# EAGLE board main (EAGLE 5.11), part 1 of 3
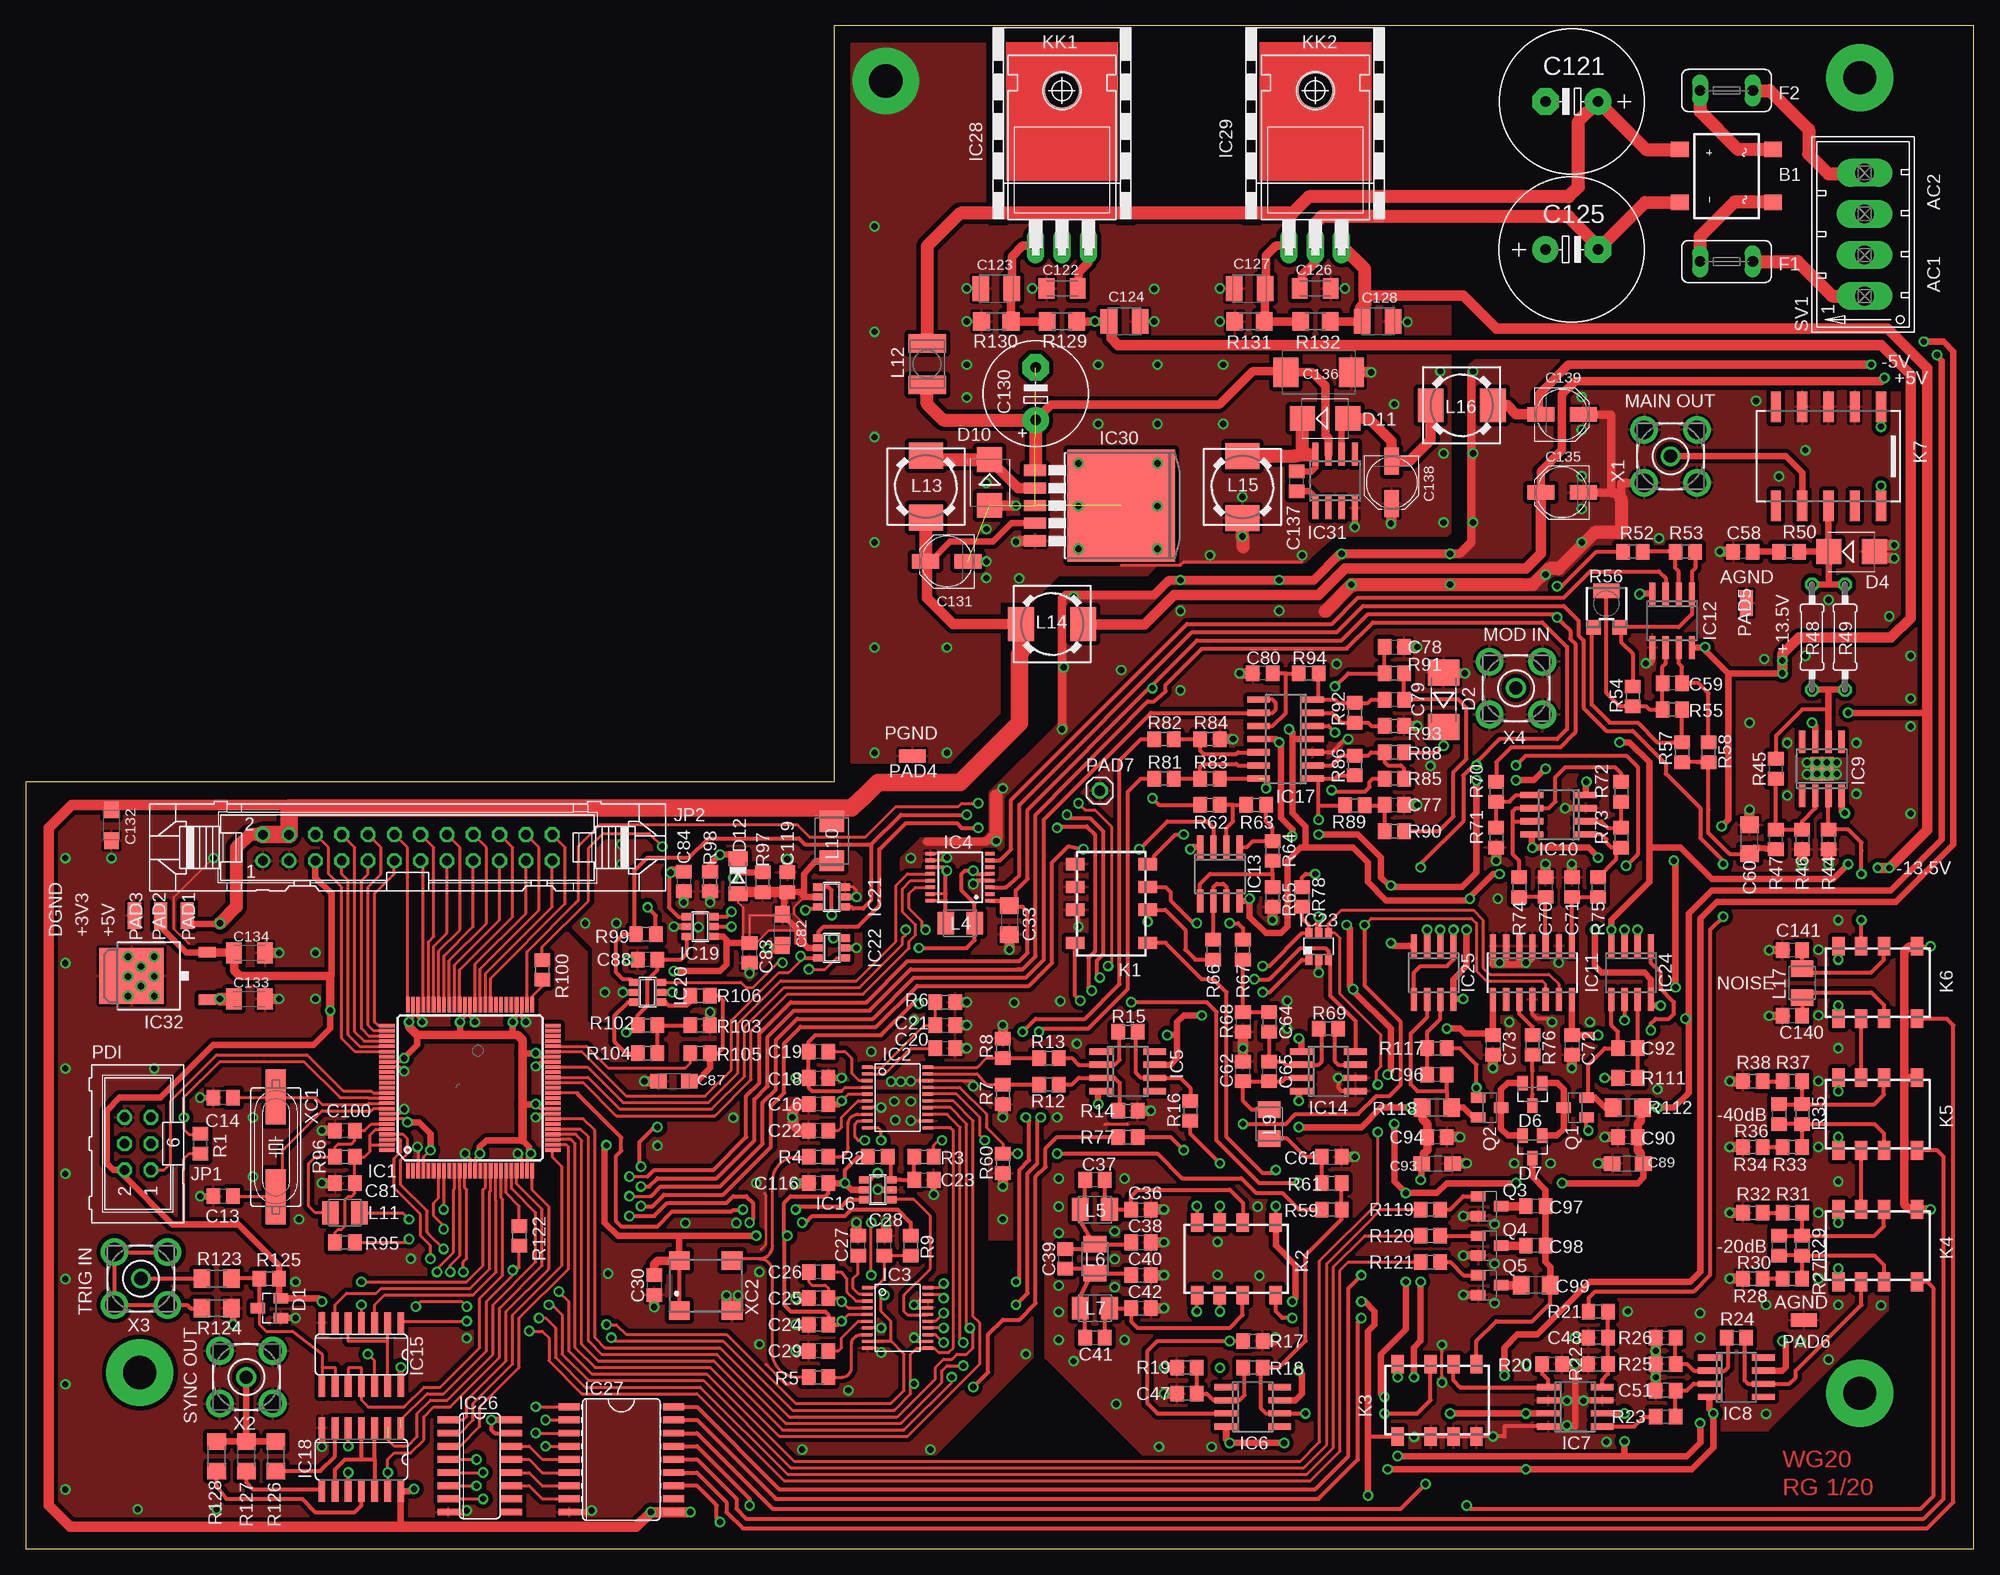
[diagram p0: board, top side]
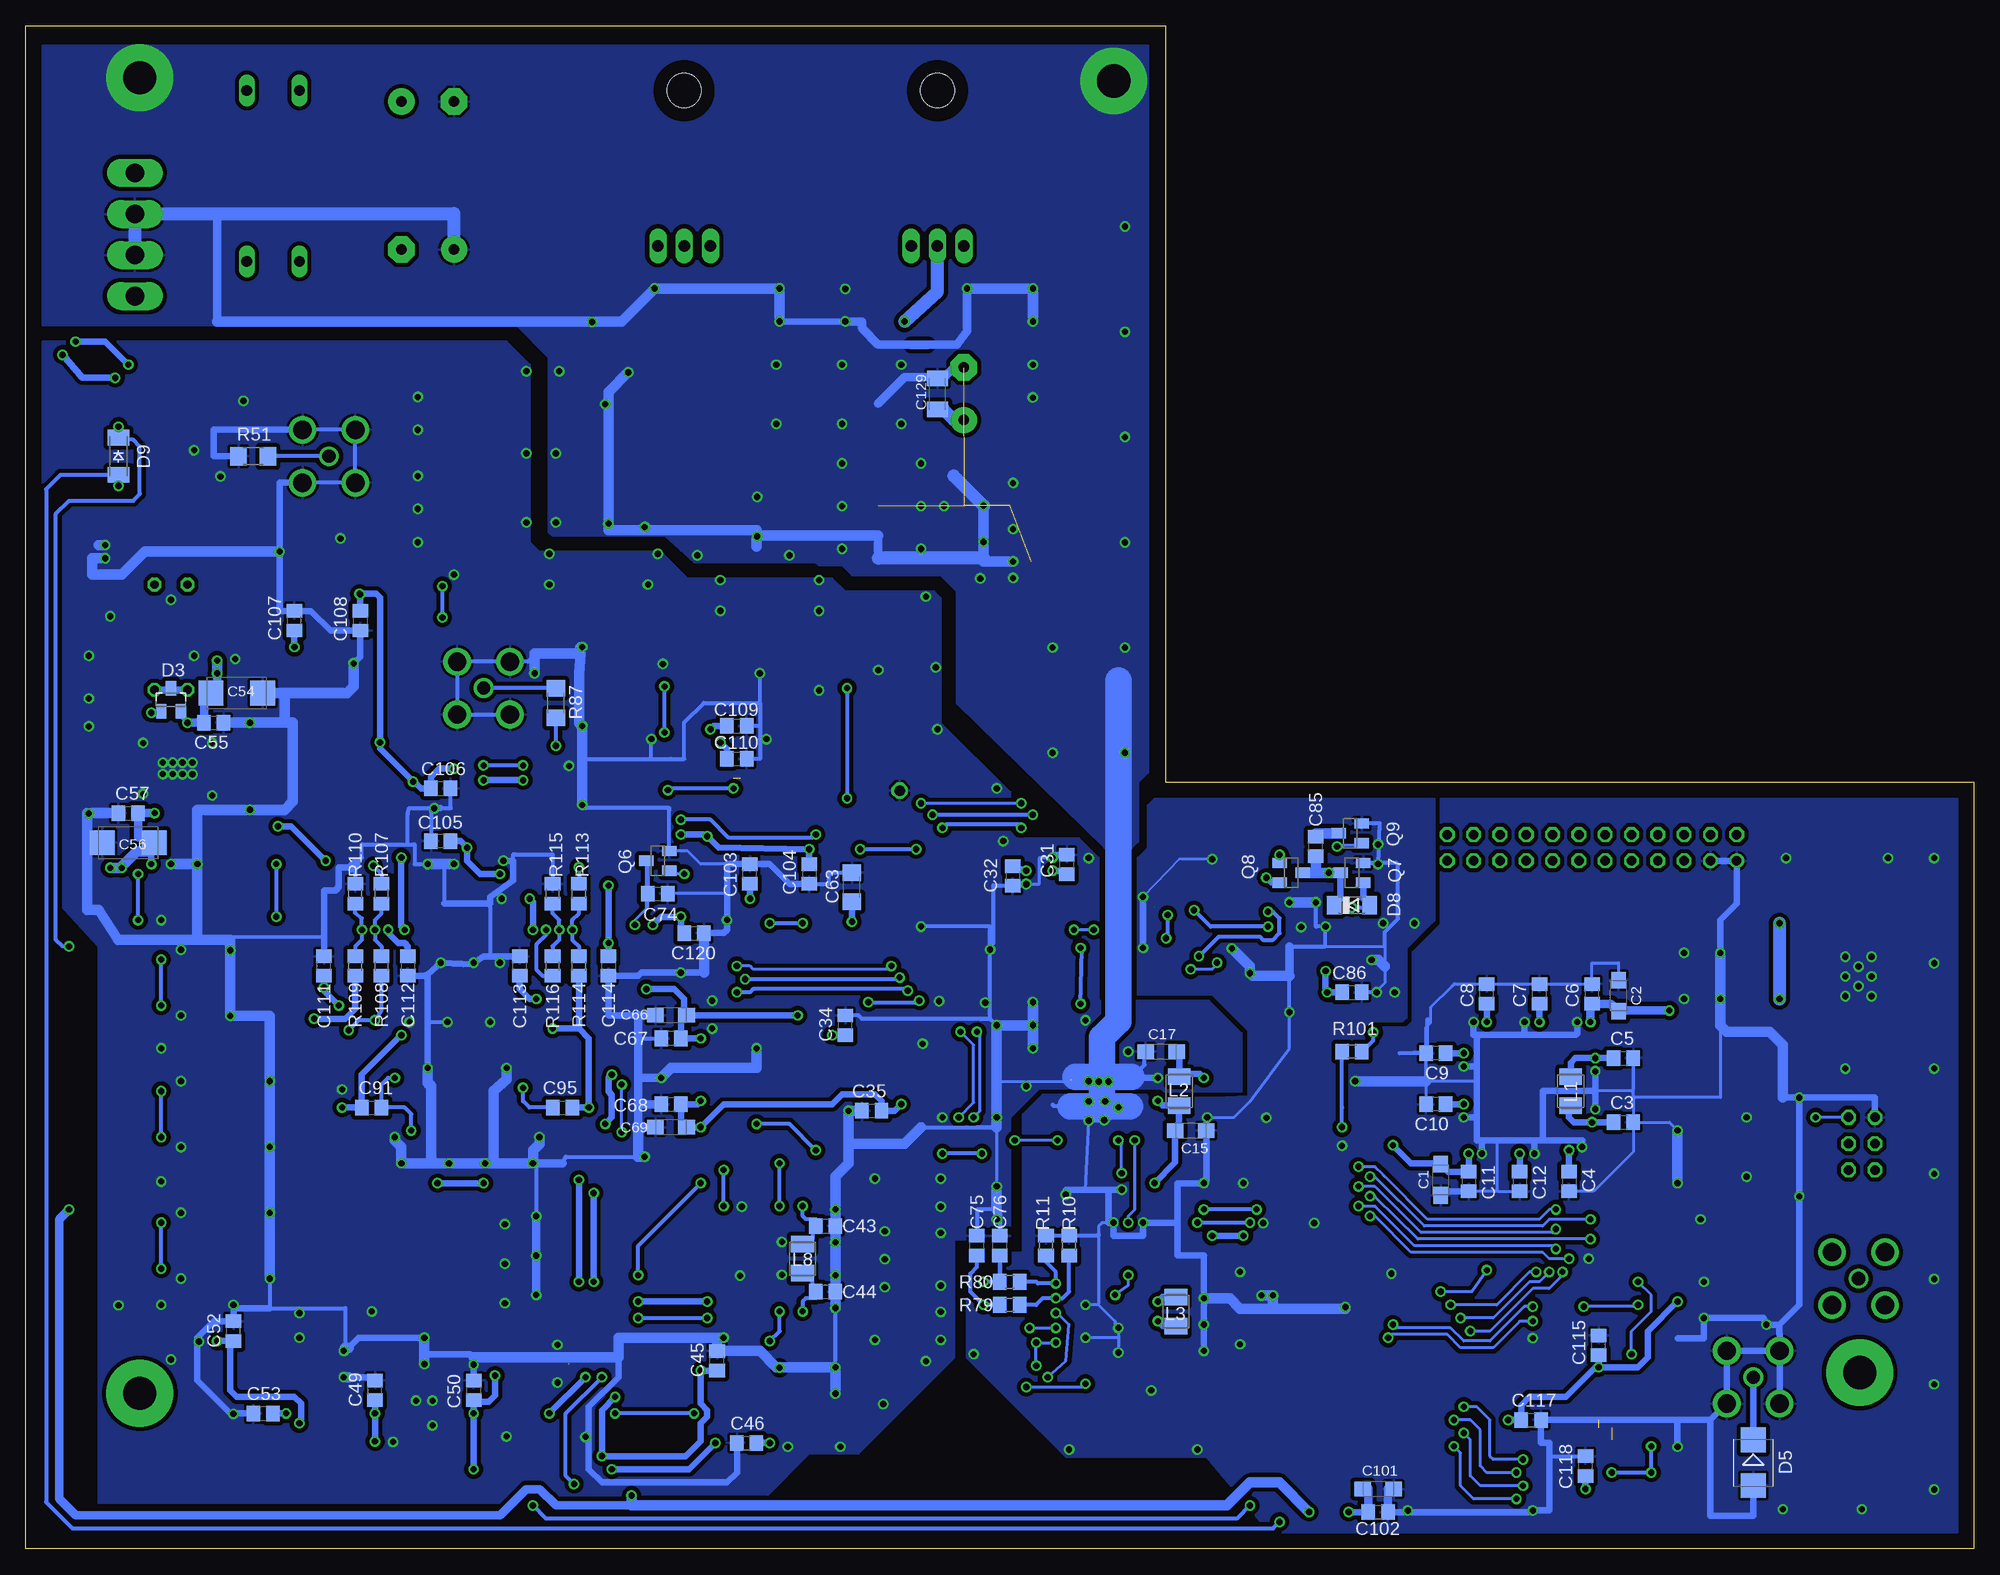
[diagram p1: board, bottom side, seen from below]

Size 188 x 147 mm. Coordinates in mm from the lower left corner, seen from the top.
Outline: 0,0 188,0 188,147 78,147 78,74 0,74 0,0
Copper layers (1*16): Top 0.035mm / dielectric 1.5mm / Bottom 0.035mm
Design rules "default": minimum track width 10mil, minimum drill 24mil, track to track 8mil, track to pad 8mil, pad to pad 8mil, via to via 8mil, smd to smd 8mil, copper to edge 40mil, drill to drill 8mil, minimum pad ring 10mil, minimum via ring 8mil, stop-mask expansion 4mil, vias tented up to drill 0mil, thermal gap 10mil

## Footprints (pad centres in the part's own frame; a part is rotated, then mirrored left to right if it is on the bottom)
DFS = smd 1.5 x 1.7: + -2.55,-4.5; - 2.55,-4.5; AC1 -2.55,4.5; AC2 2.55,4.5
SMC_A = smd 1.6 x 1.4: + -1.5,0; - 1.5,0
C0805 = smd 1.3 x 1.5: 1 -0.95,0; 2 0.95,0
C1206 = smd 1.6 x 1.8: 1 -1.4,0; 2 1.4,0
SMC_C = smd 2.4 x 2.4: + -2.5,0; - 2.5,0
E5-13 = drill 1.016 pad 2.54 round: + -2.54,0 | drill 1.016 pad 2.54 octagon: - 2.54,0
C1206K = smd 1.5 x 2: 1 -1.5,0; 2 1.5,0
SMC_B = smd 1.6 x 2.4: + -1.5,0; - 1.5,0
E5-10,5 = drill 1.016 pad 2.54 round: + -2.54,0 | drill 1.016 pad 2.54 octagon: - 2.54,0
PANASONIC_C = smd 2.6 x 1.4: + 2.05,0; - -2.05,0
SMC_D = smd 2.4 x 2.8: + -3.15,0; - 3.15,0
SOT23 = smd 1 x 1.4: 1 -0.95,-1.1; 2 0.95,-1.1; 3 0,1.1
MELF-MLL41 = smd 2.5 x 3: A 2.625,0; C -2.625,0
SMB = smd 2.4 x 2.4: A 2.2,0; C -2.2,0
SOD80C = smd 1.4 x 1.8: A 1.7,0; C -1.7,0
SOD-123_MINI-SMA = smd 1.5 x 2.1: A 1.8,0; C -1.8,0
TE5 = drill 1.016 long: 1 -2.54,0; 2 2.54,0
TQFP100 = smd 1.5 x 0.35: 1 -8,6; 2 -8,5.5; 3 -8,5; 4 -8,4.5; 5 -8,4; 6 -8,3.5; 7 -8,3; 8 -8,2.5; 9 -8,2; 10 -8,1.5; 11 -8,1; 12 -8,0.5; 13 -8,0; 14 -8,-0.5; 15 -8,-1; 16 -8,-1.5; 17 -8,-2; 18 -8,-2.5; 19 -8,-3; 20 -8,-3.5; 21 -8,-4; 22 -8,-4.5; 23 -8,-5; 24 -8,-5.5; 25 -8,-6; 51 8,-6; 52 8,-5.5; 53 8,-5; 54 8,-4.5; 55 8,-4; 56 8,-3.5; 57 8,-3; 58 8,-2.5; 59 8,-2; 60 8,-1.5; 61 8,-1; 62 8,-0.5; 63 8,0; 64 8,0.5; 65 8,1; 66 8,1.5; 67 8,2; 68 8,2.5; 69 8,3; 70 8,3.5; 71 8,4; 72 8,4.5; 73 8,5; 74 8,5.5; 75 8,6 | smd 0.35 x 1.5: 26 -6,-8; 27 -5.5,-8; 28 -5,-8; 29 -4.5,-8; 30 -4,-8; 31 -3.5,-8; 32 -3,-8; 33 -2.5,-8; 34 -2,-8; 35 -1.5,-8; 36 -1,-8; 37 -0.5,-8; 38 0,-8; 39 0.5,-8; 40 1,-8; 41 1.5,-8; 42 2,-8; 43 2.5,-8; 44 3,-8; 45 3.5,-8; 46 4,-8; 47 4.5,-8; 48 5,-8; 49 5.5,-8; 50 6,-8; 76 6,8; 77 5.5,8; 78 5,8; 79 4.5,8; 80 4,8; 81 3.5,8; 82 3,8; 83 2.5,8; 84 2,8; 85 1.5,8; 86 1,8; 87 0.5,8; 88 0,8; 89 -0.5,8; 90 -1,8; 91 -1.5,8; 92 -2,8; 93 -2.5,8; 94 -3,8; 95 -3.5,8; 96 -4,8; 97 -4.5,8; 98 -5,8; 99 -5.5,8; 100 -6,8
TSSOP20 = smd 0.305 x 0.991: 1 -2.94,-2.918; 2 -2.29,-2.918; 3 -1.64,-2.918; 4 -0.99,-2.918; 5 -0.34,-2.918; 6 0.31,-2.918; 7 0.96,-2.918; 8 1.61,-2.918; 9 2.26,-2.918; 10 2.91,-2.918; 11 2.91,2.918; 12 2.26,2.918; 13 1.61,2.918; 14 0.96,2.918; 15 0.31,2.918; 16 -0.34,2.918; 17 -0.99,2.918; 18 -1.64,2.918; 19 -2.29,2.918; 20 -2.94,2.918
TSSOP16 = smd 0.9 x 0.35: 1 -2.875,2.275; 2 -2.875,1.625; 3 -2.875,0.975; 4 -2.875,0.325; 5 -2.875,-0.325; 6 -2.875,-0.975; 7 -2.875,-1.625; 8 -2.875,-2.275; 9 2.875,-2.275; 10 2.875,-1.625; 11 2.875,-0.975; 12 2.875,-0.325; 13 2.875,0.325; 14 2.875,0.975; 15 2.875,1.625; 16 2.875,2.275
SO8 = smd 0.6 x 2.2: 1 -1.905,-2.6; 2 -0.635,-2.6; 3 0.635,-2.6; 4 1.905,-2.6; 5 1.905,2.6; 6 0.635,2.6; 7 -0.635,2.6; 8 -1.905,2.6
R-PDSO-G8 = smd 0.6 x 2.2: 1 -1.905,-2.6; 2 -0.635,-2.6; 3 0.635,-2.6; 4 1.905,-2.6; 5 1.905,2.6; 6 0.635,2.6; 7 -0.635,2.6; 8 -1.905,2.6 | smd 2.28 x 2.28: TH 0,0
SO08 = smd 0.6 x 2.2: 1 -1.905,-2.6; 2 -0.635,-2.6; 3 0.635,-2.6; 4 1.905,-2.6; 5 1.905,2.6; 6 0.635,2.6; 7 -0.635,2.6; 8 -1.905,2.6
SO14 = smd 0.6 x 2.2: 1 -3.81,-2.6; 2 -2.54,-2.6; 3 -1.27,-2.6; 4 0,-2.6; 5 1.27,-2.6; 6 2.54,-2.6; 7 3.81,-2.6; 8 3.81,2.6; 9 2.54,2.6; 10 1.27,2.6; 11 0,2.6; 12 -1.27,2.6; 13 -2.54,2.6; 14 -3.81,2.6
SO14' = smd 0.66 x 2.032: 1 -3.81,-3.073; 2 -2.54,-3.073; 3 -1.27,-3.073; 4 0,-3.073; 5 1.27,-3.073; 6 2.54,-3.073; 7 3.81,-3.073; 8 3.81,3.073; 9 2.54,3.073; 10 1.27,3.073; 11 0,3.073; 12 -1.27,3.073; 13 -2.54,3.073; 14 -3.81,3.073
SOT23-6 = smd 0.69 x 0.99: 1 -0.95,-1.29; 2 0,-1.29; 3 0.95,-1.29; 4 0.95,1.3; 5 0,1.3; 6 -0.95,1.3
DBV_R-PDSO-G6 = smd 0.69 x 0.99: 1 -0.95,-1.29; 2 0,-1.29; 3 0.95,-1.29; 4 0.95,1.3; 5 0,1.3; 6 -0.95,1.3
SO16 = smd 0.66 x 2.032: 1 -4.445,-3.073; 2 -3.175,-3.073; 3 -1.905,-3.073; 4 -0.635,-3.073; 5 0.635,-3.073; 6 1.905,-3.073; 7 3.175,-3.073; 8 4.445,-3.073; 9 4.445,3.073; 10 3.175,3.073; 11 1.905,3.073; 12 0.635,3.073; 13 -0.635,3.073; 14 -1.905,3.073; 15 -3.175,3.073; 16 -4.445,3.073
SO18W = smd 0.66 x 2.032: 1 -5.08,-5.029; 2 -3.81,-5.029; 3 -2.54,-5.029; 4 -1.27,-5.029; 5 0,-5.029; 6 1.27,-5.029; 7 2.54,-5.029; 8 3.81,-5.029; 9 5.08,-5.029; 10 5.08,5.029; 11 3.81,5.029; 12 2.54,5.029; 13 1.27,5.029; 14 0,5.029; 15 -1.27,5.029; 16 -2.54,5.029; 17 -3.81,5.029; 18 -5.08,5.029
TO220H = drill 1.118 long: 1 -2.54,-10.16; 2 0,-10.16; 3 2.54,-10.16 | hole 3.302: 0,4.826
TO263-5 = smd 1.067 x 2.159: 1 -3.404,-5.791; 2 -1.702,-5.791; 3 0,-5.791; 4 1.702,-5.791; 5 3.404,-5.791 | smd 10.8 x 10.41: 6 0,2.54
TO252 = smd 1 x 1.6: 1 -2.28,-4.8; 2 2.28,-4.8 | smd 5.4 x 6.2: 3 0,2.5
ML6 = drill 0.914 octagon: 1 -2.54,-1.27; 2 -2.54,1.27; 3 0,-1.27; 4 0,1.27; 5 2.54,-1.27; 6 2.54,1.27
24V = drill 0.914 round: 1 -13.97,-1.27 | drill 0.914 octagon: 2 -13.97,1.27; 3 -11.43,-1.27; 4 -11.43,1.27; 5 -8.89,-1.27; 6 -8.89,1.27; 7 -6.35,-1.27; 8 -6.35,1.27; 9 -3.81,-1.27; 10 -3.81,1.27; 11 -1.27,-1.27; 12 -1.27,1.27; 13 1.27,-1.27; 14 1.27,1.27; 15 3.81,-1.27; 16 3.81,1.27; 17 6.35,-1.27; 18 6.35,1.27; 19 8.89,-1.27; 20 8.89,1.27; 21 11.43,-1.27; 22 11.43,1.27; 23 13.97,-1.27; 24 13.97,1.27
G6K-2F-Y = smd 1.2 x 1.8: 1 -3.8,-3.5; 2 -0.6,-3.5; 3 1.6,-3.5; 4 3.8,-3.5; 5 3.8,3.5; 6 1.6,3.5; 7 -0.6,3.5; 8 -3.8,3.5
TQ-SA = smd 1 x 2.94: 1 -5.08,-4.78; 2 -2.54,-4.78; 3 0,-4.78; 4 2.54,-4.78; 5 5.08,-4.78; 6 5.08,4.78; 7 2.54,4.78; 8 0,4.78; 9 -2.54,4.78; 10 -5.08,4.78
L3225M = smd 1.6 x 2.2: 1 -1.4,0; 2 1.4,0
L4532M = smd 2 x 2.4: 1 -1.9,0; 2 1.9,0
L4532P = smd 1.8 x 3.6: 1 -2,0; 2 2,0
DR74 = smd 2.5 x 3.25: 1 -3,0; 2 3,0
SMD1,27-2,54 = smd 1.27 x 2.54: 1 0,0
1X01 = drill 1.016 octagon: 1 0,0
SOT23-BEC = smd 1 x 1.4: B -0.95,-1.1; C 0,1.1; E 0.95,-1.1
R0805 = smd 1.3 x 1.5: 1 -0.95,0; 2 0.95,0
0207/10 = drill 0.813 octagon: 1 -5.08,0; 2 5.08,0
R1206 = smd 1.6 x 1.803: 1 -1.422,0; 2 1.422,0
RTRIM3304W = smd 1.4 x 1.4: 1 -1.25,-1.9; 3 1.25,-1.9 | smd 2.5 x 1.4: 2 0,1.6
MT6-4Y = drill 1.803 long: 1 2.54,0; 2 6.502,0; 3 10.465,0; 4 14.427,0
BU-SMA-V = drill 1.27 round: 1 0,0 | drill 1.778 round: 2 -2.55,2.55; 3 2.55,2.55; 4 2.55,-2.55; 5 -2.55,-2.55
HC49UP = smd 5.334 x 1.93: 1 -4.826,0; 2 4.826,0
SG7050CAN = smd 2 x 1.8: 1 -2.55,-2.4; 2 2.55,-2.4; 3 2.55,2.4; 4 -2.55,2.4

## Placement (x,y rotation side)
B1  DF01S  [DFS]  164.15,132.51 270 top
C1  10u/6,3V  [SMC_A]  51.44,35.61 270 bottom
C2  10u/6,3V  [SMC_A]  34.29,53.39 90 bottom
C3  100n  [C0805]  33.81,41.16 0 bottom
C4  100n  [C0805]  39.05,35.45 270 bottom
C5  100n  [C0805]  33.81,47.36 0 bottom
C6  100n  [C0805]  36.83,53.55 90 bottom
C7  100n  [C0805]  41.91,53.55 90 bottom
C8  100n  [C0805]  46.99,53.55 90 bottom
C9  100n  [C0805]  51.91,47.83 180 bottom
C10  100n  [C0805]  51.91,42.91 180 bottom
C11  100n  [C0805]  48.74,35.45 270 bottom
C12  100n  [C0805]  43.81,35.45 270 bottom
C13  22p  [C0805]  19.05,34.02 180 top
C14  22p  [C0805]  19.05,43.55 180 top
C15  10u  [SMC_A]  75.56,40.37 0 bottom
C16  100n  [C0805]  76.52,42.91 180 top
C17  10u  [SMC_A]  78.42,47.99 180 bottom
C18  100n  [C0805]  76.52,45.45 0 top
C19  10n  [C0805]  76.52,47.99 180 top
C20  100n  [C0805]  88.74,48.31 0 top
C21  10n  [C0805]  88.74,50.53 0 top
C22  100n  [C0805]  76.52,40.37 180 top
C23  120p  [C0805]  86.68,35.61 0 top
C24  100n  [C0805]  76.52,21.64 180 top
C25  100n  [C0805]  76.52,24.18 180 top
C26  10n  [C0805]  76.52,26.72 180 top
C27  100n  [C0805]  80.33,29.26 90 top
C28  10n  [C0805]  82.87,29.26 90 top
C29  100n  [C0805]  76.52,19.1 180 top
C30  100n  [C0805]  60.64,25.45 270 top
C31  100n  [C0805]  87.52,66.04 90 bottom
C32  100n  [C0805]  92.76,64.93 270 bottom
C33  1u  [C1206]  94.93,60.69 270 top
C34  100n  [C0805]  108.9,50.53 90 bottom
C35  100n  [C0805]  106.36,42.27 0 bottom
C36  39p  [C0805]  107.63,32.75 0 top
C37  3.3p  [C0805]  103.19,35.61 180 top
C38  82p  [C0805]  107.63,29.57 0 top
C39  15p  [C0805]  100.33,27.99 270 top
C40  82p  [C0805]  107.63,26.4 0 top
C41  12p  [C0805]  103.19,20.37 0 top
C42  39p  [C0805]  107.63,23.23 0 top
C43  22p  [C0805]  110.81,31.16 0 bottom
C44  150p  [C0805]  110.81,24.81 0 bottom
C45  100n  [C0805]  121.28,18.14 90 bottom
C46  100n  [C0805]  118.43,10.21 0 bottom
C47  8p2  [C0805]  112.08,14.97 180 top
C48  4n7  [C0805]  151.76,20.37 180 top
C49  100n  [C0805]  154.31,15.29 90 bottom
C50  100n  [C0805]  144.78,15.29 270 bottom
C51  15p  [C0805]  158.27,15.29 180 top
C52  100n  [C0805]  167.96,21 90 bottom
C53  100n  [C0805]  165.1,13.06 0 bottom
C54  10u/25V  [SMC_C]  167.64,82.6 0 bottom
C55  100n  [C0805]  169.86,79.74 0 bottom
C56  10u/25V  [SMC_C]  178.12,68.15 0 bottom
C57  100n  [C0805]  178.12,71.01 0 bottom
C58  15p  [C0805]  165.74,96.25 180 top
C59  10n  [C0805]  158.91,83.55 180 top
C60  1u  [C1206]  166.37,68.47 90 top
C61  47p  [C0805]  126.05,37.83 0 top
C62  100p  [C0805]  117.47,46.09 90 top
C63  1u  [C1206]  108.27,63.87 90 bottom
C64  10n  [C0805]  117.47,50.85 270 top
C65  22p  [C0805]  120.02,46.09 270 top
C66  10u/10V  [SMC_A]  125.73,51.48 180 bottom
C67  100n  [C0805]  125.73,49.26 180 bottom
C68  100n  [C0805]  125.73,42.91 0 bottom
C69  10u/10V  [SMC_A]  125.73,40.69 0 bottom
C70  22n  [C0805]  146.69,63.87 90 top
C71  22n  [C0805]  149.22,63.87 90 top
C72  100n  [C0805]  149.22,48.63 270 top
C73  100n  [C0805]  141.6,48.63 270 top
C74  47p  [C0805]  127,63.23 0 bottom
C75  10n  [C0805]  96.2,29.26 90 bottom
C76  10n  [C0805]  93.98,29.26 90 bottom
C77  4n7  [C0805]  132.08,71.8 0 top
C78  1n  [C0805]  132.08,87.04 0 top
C79  1n  [C0805]  132.08,81.96 180 top
C80  10n  [C0805]  119.38,84.5 180 top
C81  1n  [C0805]  30.8,35.29 180 top
C82  10u/10V  [SMC_A]  73.03,59.74 270 top
C83  100n  [C0805]  69.85,57.52 270 top
C84  100p  [C0805]  63.5,64.41 270 top
C85  100p  [C0805]  63.5,67.79 90 bottom
C86  100n  [C0805]  60.01,53.7 0 bottom
C87  1u/6.3V  [SMC_A]  62.55,45.13 180 top
C88  100n  [C0805]  60.01,56.88 180 top
C89  10u/10V  [SMC_A]  154.62,37.2 180 top
C90  100n  [C0805]  154.62,39.73 180 top
C91  100n  [C0805]  154.62,42.59 0 bottom
C92  100n  [C0805]  154.62,48.31 0 top
C93  10u/10V  [SMC_A]  136.21,37.2 180 top
C94  100n  [C0805]  136.21,39.73 180 top
C95  100n  [C0805]  136.21,42.59 0 bottom
C96  100n  [C0805]  136.21,45.77 180 top
C97  100p  [C0805]  145.73,33.07 180 top
C98  10n  [C0805]  145.73,29.26 180 top
C99  1u  [C1206]  145.73,25.45 180 top
C100  100n  [C0805]  30.8,40.37 180 top
C101  10u/10V  [SMC_A]  57.47,5.76 0 bottom
C102  100n  [C0805]  57.47,3.54 0 bottom
C103  100n  [C0805]  118.11,65.14 90 bottom
C104  100n  [C0805]  112.39,65.14 270 bottom
C105  100n  [C0805]  147.96,68.31 180 bottom
C106  100n  [C0805]  147.96,73.39 0 bottom
C107  100n  [C0805]  162.08,89.58 90 bottom
C108  100n  [C0805]  155.73,89.58 270 bottom
C109  100n  [C0805]  119.38,79.42 0 bottom
C110  100n  [C0805]  119.38,76.25 0 bottom
C111  100n  [C0805]  159.23,56.24 90 bottom
C112  100n  [C0805]  151.13,56.24 270 bottom
C113  100n  [C0805]  140.34,56.24 90 bottom
C114  100n  [C0805]  131.76,56.24 270 bottom
C115  100n  [C0805]  36.2,19.64 90 bottom
C116  100n  [C0805]  76.52,35.29 180 top
C117  100n  [C0805]  42.7,12.43 0 bottom
C118  100n  [C0805]  37.47,7.99 90 bottom
C119  100n  [C0805]  73.5,64.34 90 top
C120  100n  [C0805]  123.51,59.42 0 bottom
C121  2200u/25V  [E5-13]  149.22,139.7 180 top
C122  100n  [C1206K]  100.01,121.65 180 top
C123  10u/25V  [SMC_B]  93.66,121.65 180 top
C124  10u/25V  [SMC_B]  106.05,118.47 0 top
C125  2200u/25V  [E5-13]  149.21,125.41 0 top
C126  100n  [C1206K]  124.46,121.65 180 top
C127  10u/25V  [SMC_B]  118.11,121.65 0 top
C128  10u/25V  [SMC_B]  130.49,118.47 180 top
C129  100n  [C1206K]  100.01,111.49 90 bottom
C130  470u/25V  [E5-10,5]  97.47,111.49 90 top
C131  220u/16V  [PANASONIC_C]  88.9,95.3 180 top
C132  10u/10V  [SMC_A]  8.26,69.85 270 top
C133  100n  [C1206K]  21.59,53.07 0 top
C134  1u  [C1206K]  21.59,57.52 0 top
C135  220u/16V  [PANASONIC_C]  148.27,101.97 180 top
C136  10u/35V  [SMC_D]  124.78,113.55 0 top
C137  10n  [C0805]  122.66,103.04 90 top
C138  100u/16V  [PANASONIC_C]  131.82,102.92 270 top
C139  220u/16V  [PANASONIC_C]  148.27,109.49 0 top
C140  47p  [C0805]  170.5,51.44 180 top
C141  47p  [C0805]  170.5,57.78 180 top
D1  BAV199  [SOT23]  23.5,23.23 90 top
D2  SDA4AK  [MELF-MLL41]  136.84,81.96 90 top
D3  BAV199  [SOT23]  173.99,81.96 0 bottom
D4  SM6T15  [SMB]  176.21,96.25 0 top
D5  SM6T6  [SMB]  21.27,8.3 270 bottom
D6  BAV199  [SOT23]  145.41,43.86 180 top
D7  BAV199  [SOT23]  145.41,38.78 180 top
D8  BAT43  [SOD80C]  60.01,62.12 0 bottom
D9  1N4001  [SOD-123_MINI-SMA]  179.07,105.46 270 bottom
D10  SK31  [SMB]  93.03,102.92 270 top
D11  SK31  [SMB]  125.41,109.11 0 top
D12  1N4148  [SOD80C]  68.74,64.93 270 top
F1  T1A  [TE5]  164.15,124.25 180 top
F2  T1A  [TE5]  164.15,140.76 180 top
IC1  XMEGA128A1  [TQFP100]  42.86,44.5 90 top
IC2  AD9834  [TSSOP20]  84.14,43.55 270 top
IC3  AD9834  [TSSOP20]  84.14,22.27 270 top
IC4  AD5689R  [TSSOP16]  90.17,64.82 180 top
IC5  AD8055  [SO8]  106.36,46.09 270 top
IC6  AD8055  [SO8]  118.43,13.7 270 top
IC7  AD835  [SO8]  149.54,13.7 270 top
IC8  AD8009  [SO8]  165.1,16.56 270 top
IC9  THS3091  [R-PDSO-G8]  173.35,75.3 0 top
IC10  NE5532D  [SO08]  147.96,70.85 90 top
IC11  AD8184  [SO14]  145.41,55.61 180 top
IC12  NE5532D  [SO08]  158.91,89.58 180 top
IC13  NE5532  [SO08]  115.25,65.14 180 top
IC14  AD8561  [SO8]  125.73,46.09 270 top
IC15  74HC02  [SO14']  32.38,18.73 180 top
IC16  74LVC1G57  [SOT23-6]  82.23,34.66 90 top
IC17  TL074  [SO14]  121.6,78.15 90 top
IC18  74HCT00  [SO14']  32.38,8.62 180 top
IC19  TLV3501  [SOT23-6]  65.09,60.05 270 top
IC20  LTC6993  [SOT23-6]  60.01,53.7 270 top
IC21  74LVC1G57  [SOT23-6]  77.79,62.91 90 top
IC22  74LVC1G57  [SOT23-6]  77.79,57.99 90 top
IC23  74LVC1G3157  [DBV_R-PDSO-G6]  124.78,58.15 0 top
IC24  NE5532  [SO08]  154.94,55.61 180 top
IC25  NE5532  [SO08]  135.89,55.61 180 top
IC26  74HC4094  [SO16]  43.81,7.99 270 top
IC27  ULN2803  [SO18W]  57.47,8.62 270 top
IC28  LM317  [TO220H]  100.01,135.94 0 top
IC29  LM337  [TO220H]  124.46,135.94 0 top
IC30  LM2596  [TO263-5]  103.19,100.69 270 top
IC31  LM2675  [SO8]  126.36,103.08 0 top
IC32  LF33  [TO252]  12.7,55.29 90 top
JP1  6P  [ML6]  10.79,39.1 90 top
JP2  24P  [24V]  36.83,67.67 0 top
K1  G6K-2F-Y  [G6K-2F-Y]  104.78,62.28 90 top
K2  G6K-2F-Y  [G6K-2F-Y]  116.84,27.99 180 top
K3  G6K-2F-Y  [G6K-2F-Y]  136.21,14.34 0 top
K4  G6K-2F-Y  [G6K-2F-Y]  178.75,29.26 180 top
K5  G6K-2F-Y  [G6K-2F-Y]  178.75,41.96 180 top
K6  G6K-2F-Y  [G6K-2F-Y]  178.75,54.66 180 top
K7  TQ2-SA-5V  [TQ-SA]  173.99,105.46 180 top
KK1  D0A-L  [D02A-L]  100.01,135.3 270 top
KK2  D0A-L  [D02A-L]  124.46,135.3 270 top
L1  10uH  [L3225M]  38.89,44.18 270 bottom
L2  10u  [L3225M]  76.68,44.18 90 bottom
L3  10u  [L3225M]  76.99,22.91 90 bottom
L4  10u  [L3225M]  90.17,60.37 0 top
L5  1u  [L3225M]  103.19,32.75 180 top
L6  1u  [L3225M]  103.19,27.99 270 top
L7  1u  [L3225M]  103.19,23.23 0 top
L8  1u  [L3225M]  113.03,27.99 270 bottom
L9  1u  [L3225M]  120.02,41.01 270 top
L10  10u  [L4532M]  77.79,68.31 270 top
L11  10u  [L3225M]  30.8,32.43 0 top
L12  100uH  [L4532P]  87,114.35 270 top
L13  100uH  [DR74]  86.88,102.53 270 top
L14  1mH  [DR74]  99.06,89.27 0 top
L15  150uH  [DR74]  117.42,102.49 270 top
L16  1mH  [DR74]  138.59,110.38 0 top
L17  1u  [L3225M]  171.45,54.61 90 top
PAD1  [SMD1,27-2,54]  15.56,61.12 0 top
PAD2  [SMD1,27-2,54]  13.02,61.12 0 top
PAD3  [SMD1,27-2,54]  10.48,61.12 180 top
PAD4  [SMD1,27-2,54]  85.57,76.52 90 top
PAD5  [SMD1,27-2,54]  166.05,91.28 180 top
PAD6  [SMD1,27-2,54]  171.61,22.07 90 top
PAD7  [1X01]  103.66,73.18 0 top
Q1  BC857  [SOT23-BEC]  149.54,42.59 90 top
Q2  BC847  [SOT23]  141.29,42.59 270 top
Q3  BC847  [SOT23]  141.29,33.07 270 top
Q4  BC847  [SOT23]  141.29,29.26 270 top
Q5  BC847  [SOT23]  141.29,25.45 270 top
Q6  BC847  [SOT23]  127,66.41 90 bottom
Q7  BC817  [SOT23]  60.01,65.25 90 bottom
Q8  BC827  [SOT23-BEC]  65.88,65.25 270 bottom
Q9  BC817  [SOT23]  60.17,69.06 90 bottom
R1  10k  [R0805]  16.83,39.1 270 top
R2  100k  [R0805]  82.23,37.83 0 top
R3  100R  [R0805]  86.68,37.83 180 top
R4  10R  [R0805]  76.52,37.83 180 top
R5  10R  [R0805]  76.52,16.56 0 top
R6  6k8  [R0805]  88.74,52.75 0 top
R7  240R  [R0805]  94.3,43.86 270 top
R8  240R  [R0805]  94.3,48.31 90 top
R9  6k8  [R0805]  85.41,29.26 90 top
R10  180R  [R0805]  87.31,29.26 270 bottom
R11  180R  [R0805]  89.53,29.26 270 bottom
R12  510R  [R0805]  98.74,44.81 180 top
R13  510R  [R0805]  98.74,47.35 180 top
R14  820R  [R0805]  106.36,42.27 180 top
R15  820R  [R0805]  106.36,49.9 180 top
R16  120R  [R0805]  112.39,42.27 90 top
R17  120R  [R0805]  118.43,20.05 0 top
R18  820R  [R0805]  118.43,17.51 180 top
R19  510R  [R0805]  112.08,17.51 180 top
R20  100k  [R0805]  147.32,17.83 0 top
R21  1k5  [R0805]  151.76,22.91 180 top
R22  1k  [R0805]  151.76,17.83 180 top
R23  47R  [R0805]  158.27,12.75 180 top
R24  330  [R0805]  165.1,20.37 180 top
R25  6k8  [R0805]  158.27,17.83 180 top
R26  120  [R0805]  158.27,20.37 180 top
R27  120R  [R0805]  170.5,26.08 180 top
R28  2R2  [R0805]  166.69,26.08 180 top
R29  1k  [R0805]  171.45,29.26 90 top
R30  1k  [R0805]  169.23,29.26 90 top
R31  120R  [R0805]  170.5,32.43 180 top
R32  2R2  [R0805]  166.69,32.43 180 top
R33  100R  [R0805]  170.5,38.78 180 top
R34  2R2  [R0805]  166.69,38.78 180 top
R35  10k  [R0805]  171.45,41.96 90 top
R36  10k  [R0805]  169.23,41.96 90 top
R37  100R  [R0805]  170.5,45.13 180 top
R38  2R2  [R0805]  166.69,45.13 180 top
R44  300R  [R0805]  173.99,68.47 270 top
R45  1k2  [R0805]  168.91,75.3 270 top
R46  1k2  [R0805]  171.45,68.47 270 top
R47  1k2  [R0805]  168.91,68.47 270 top
R48  100R  [0207/10]  172.4,88 90 top
R49  100R  [0207/10]  175.58,88 90 top
R50  47R  [R0805]  170.18,96.25 0 top
R51  1M  [R1206]  166.05,105.46 180 bottom
R52  2k7  [R0805]  155.1,96.25 180 top
R53  2k7  [R0805]  160.18,96.25 180 top
R54  1k5  [R0805]  155.1,82.28 90 top
R55  1k5  [R0805]  158.91,81.01 180 top
R56  10k  [RTRIM3304W]  152.56,90.85 0 top
R57  3k9  [R0805]  159.86,76.88 90 top
R58  22R  [R0805]  162.4,76.88 90 top
R59  12k  [R0805]  126.05,32.75 0 top
R60  8k2  [R0805]  94.3,37.2 90 top
R61  100R  [R0805]  126.05,35.29 0 top
R62  2k7  [R0805]  114.3,71.8 180 top
R63  2k7  [R0805]  118.75,71.8 180 top
R64  3k9  [R0805]  120.33,67.36 90 top
R65  2k7  [R0805]  120.33,62.91 90 top
R66  22R  [R0805]  114.62,57.83 90 top
R67  10R  [R0805]  117.47,57.83 90 top
R68  33R  [R0805]  120.02,50.85 90 top
R69  4k7  [R0805]  125.73,50.21 180 top
R70  1k5  [R0805]  141.92,73.07 90 top
R71  1k  [R0805]  141.92,68.63 90 top
R72  1k  [R0805]  153.99,73.07 90 top
R73  1k  [R0805]  153.99,68.63 90 top
R74  10R  [R0805]  144.15,63.87 90 top
R75  10R  [R0805]  151.76,63.87 90 top
R76  22R  [R0805]  145.41,48.62 90 top
R77  3k3  [R0805]  106.36,39.73 180 top
R78  10k  [R0805]  123.19,62.91 270 top
R79  100R  [R0805]  93.03,23.54 180 bottom
R80  100R  [R0805]  93.03,25.77 180 bottom
R81  12k  [R0805]  109.86,74.34 0 top
R82  12k  [R0805]  109.86,78.15 0 top
R83  22k  [R0805]  114.3,74.34 0 top
R84  22k  [R0805]  114.3,78.15 0 top
R85  10k  [R0805]  132.08,74.34 0 top
R86  10k  [R0805]  128.27,75.61 270 top
R87  1k8  [R1206]  136.84,81.64 90 bottom
R88  8k2  [R0805]  132.08,76.88 180 top
R89  1k8  [R0805]  128.27,71.75 180 top
R90  10k  [R0805]  132.08,69.26 0 top
R91  10k  [R0805]  132.08,84.5 180 top
R92  3k9  [R0805]  128.27,80.69 90 top
R93  2k7  [R0805]  132.08,79.42 180 top
R94  1k  [R0805]  123.83,84.5 180 top
R95  5k6  [R0805]  30.8,29.57 180 top
R96  5k6  [R0805]  30.8,37.83 180 top
R97  10R  [R0805]  71.12,64.34 270 top
R98  3k9  [R0805]  66.04,64.41 90 top
R99  2k2  [R0805]  59.85,59.33 0 top
R100  2k2  [R0805]  49.85,55.88 90 top
R101  100R  [R0805]  60.01,47.99 0 bottom
R102  [R0805]  60.01,50.53 0 top
R103  [R0805]  65.09,50.53 180 top
R104  [R0805]  60.01,47.83 180 top
R105  10k  [R0805]  65.09,47.83 180 top
R106  100k  [R0805]  65.09,53.39 0 top
R107  10k  [R0805]  153.67,63.23 90 bottom
R108  10k  [R0805]  153.67,56.24 270 bottom
R109  10k  [R0805]  156.21,56.24 270 bottom
R110  10k  [R0805]  156.21,63.23 90 bottom
R111  100R  [R0805]  154.62,45.45 0 top
R112  240R  [R1206]  154.62,42.59 0 top
R113  10k  [R0805]  134.62,63.23 90 bottom
R114  10k  [R0805]  134.62,56.24 270 bottom
R115  10k  [R0805]  137.16,63.23 90 bottom
R116  10k  [R0805]  137.16,56.24 90 bottom
R117  100R  [R0805]  136.21,48.31 180 top
R118  240R  [R1206]  136.21,42.59 0 top
R119  5k6  [R0805]  135.57,32.75 180 top
R120  5k6  [R0805]  135.57,30.21 180 top
R121  5k6  [R0805]  135.57,27.67 180 top
R122  1k  [R0805]  47.62,30.21 270 top
R123  1k  [R1206]  18.41,26.08 0 top
R124  1k  [R1206]  18.41,23.23 0 top
R125  100k  [R0805]  23.5,26.08 180 top
R126  150R  [R1206]  24.13,8.94 90 top
R127  150R  [R1206]  21.27,8.94 90 top
R128  150R  [R1206]  18.41,8.94 90 top
R129  270R  [R1206]  100.01,118.47 0 top
R130  2k7  [R1206]  93.66,118.47 0 top
R131  2k7  [R1206]  118.11,118.47 180 top
R132  270R  [R1206]  124.46,118.47 180 top
SV1  [MT6-4Y]  177.48,118.38 90 top
X1  SMA-A  [BU-SMA-V]  158.75,105.46 90 top
X2  SMA-A  [BU-SMA-V]  21.27,16.56 180 top
X3  SMA-A  [BU-SMA-V]  11.11,26.08 90 top
X4  SMA-A  [BU-SMA-V]  143.83,83.07 0 top
XC1  16MHz  [HC49UP]  24.13,38.78 270 top
XC2  67.108864MHz  [SG7050CAN]  65.61,25.4 0 top

## Library data of the parts
B1 = rectifier
C1-C141 L1-L12 L17 R1-R38 R44-R132 = rcl
D1-D12 = diode
F1 F2 = fuse; OC_FARNELL: unknown; OC_NEWARK: unknown
IC1 = atmel; OC_FARNELL: unknown; OC_NEWARK: unknown
IC2-IC4 IC7 IC14 = analog-devices
IC5 IC6 IC8 IC9 IC11 IC16 IC19-IC22 IC31 JP2 L13-L16 = wg_library
IC10 IC12 IC13 IC17 IC24 IC25 IC28-IC30 IC32 = linear
IC15 = 74xx-us
IC18 = 74xx-eu
IC23 = 74xx-little-us
IC26 = 40xx
IC27 = uln2803
JP1 = con-harting-ml; OC_FARNELL: unknown; OC_NEWARK: unknown
K1-K6 = relay; MF: OMRON COMPONENTS USA; MPN: G6K-2F-Y DC3; OC_FARNELL: 1690316; OC_NEWARK: 89C6451
K7 = relay; MF: AROMAT/ MATSUSHITA; MPN: TQ2SA-5V; OC_FARNELL: 1124054; OC_NEWARK: 64K3205
KK1 KK2 = heatsink
PAD1-PAD6 = wirepad
PAD7 = pinhead
Q1 Q8 = transistor-pnp
Q2-Q7 Q9 = transistor-npn
SV1 = con-amp-mt6; OC_FARNELL: unknown; OC_NEWARK: unknown
X1-X4 = con-coax; OC_FARNELL: unknown; OC_NEWARK: unknown
XC1 = crystal; OC_FARNELL: unknown; OC_NEWARK: unknown
XC2 = sg7050can

## Nets
0V: C1.- C2.- C3.2 C4.2 C5.2 C6.2 C7.2 C8.2 C9.2 C10.2 C11.2 C12.2 C13.2 C14.2 C15.- C16.2 C22.2 C23.2 C24.2 C25.2 C27.2 C28.2 C29.2 C30.2 C81.2 C82.- C83.2 C84.2 C86.2 C87.- C88.2 C100.2 C101.- C102.2 C115.2 C116.2 C117.2 C118.2 C119.2 C132.- C133.2 C134.2 D1.1 D5.A IC1.3 IC1.13 IC1.23 IC1.33 IC1.43 IC1.53 IC1.63 IC1.73 IC1.84 IC1.93 IC2.7 IC2.12 IC3.7 IC3.10 IC3.12 IC3.17 IC3.18 IC15.7 IC16.2 IC18.7 IC19.2 IC20.2 IC21.2 IC21.3 IC22.2 IC26.8 IC27.9 IC32.3 JP1.6 JP2.1 JP2.3 PAD3.1 Q7.2 Q9.2 R10.1 R11.1 R98.1 R103.1 R124.2 X2.2 X2.3 X2.4 X2.5 XC2.2
!SQ!/PL: IC1.52 IC23.6 R78.2
+5V/1: C101.+ C102.1 C118.1 C131.+ C132.+ C133.1 D9.C IC18.14 IC27.10 IC30.4 IC32.1 JP2.2 JP2.4 K1.1 K2.1 K3.1 K4.1 K5.1 K6.1 K7.1 L10.1 L13.2 L14.1 PAD1.1
+5V/2: C82.+ C83.1 C86.1 C119.1 D12.A IC19.4 IC20.5 IC21.5 IC22.5 L10.2 R97.2
A_WF: IC6.6 K3.7 R18.1 R59.2 R61.2
ADC0: C81.1 IC1.96 IC1.99 R95.2 R96.1
AREF: C100.1 IC1.95 L11.1 R96.2
AVCC: C3.1 C4.1 IC1.4 IC1.94 L1.2
BURST: IC2.11 IC3.11 IC15.1 R77.2
BURST_SQU: C74.1 IC11.12 Q6.3 R77.1
CAP1: IC1.12 R119.2
CAP2: IC1.11 R120.2
CAP3: IC1.10 R121.2
CLK: IC1.27 IC26.3
D_WF: C97.1 C98.1 C99.1 D7.3 K3.5
DAC0: IC1.97 IC13.3
DAC1: IC1.98 R9.2
DAC2: IC1.7 R107.2 R113.2
DAC3: IC1.8 R101.1
DAC4: IC1.46 R105.2
DATA: IC1.26 IC26.2
DB4: IC1.77 JP2.10
DB5: IC1.78 JP2.9
DB6: IC1.79 JP2.8
DB7: IC1.80 JP2.7
DUTY: C63.1 K1.2 R66.1
EN: IC1.76 JP2.11
FSEL: IC2.9 IC3.9 IC15.4
FSEL_EN: IC1.17 IC15.6
GND: C17.- C18.2 C20.2 C21.2 C31.2 C32.2 C33.2 C34.2 C35.1 C36.2 C38.2 C40.2 C42.2 C43.2 C44.2 C45.2 C46.1 C47.2 C48.2 C49.2 C50.1 C51.2 C52.2 C53.1 C54.- C55.2 C56.+ C57.1 C58.2 C60.2 C61.2 C62.2 C63.2 C64.2 C66.- C67.2 C68.1 C69.+ C70.2 C71.2 C72.2 C73.2 C74.2 C75.2 C76.2 C77.2 C78.2 C80.2 C89.- C90.2 C93.+ C94.1 C103.2 C104.2 C105.2 C106.2 C107.2 C108.2 C109.2 C110.2 C111.2 C112.2 C113.2 C114.2 C120.2 C135.- C139.+ C140.2 C141.2 D2.A D4.A IC2.18 IC4.4 IC4.9 IC4.10 IC7.2 IC7.4 IC7.7 IC9.TH IC10.3 IC11.2 IC11.4 IC11.5 IC11.6 IC11.7 IC11.11 IC12.5 IC14.5 IC14.6 IC17.3 IC23.2 K1.5 K1.6 K1.7 K3.2 K3.3 K3.4 K7.2 K7.3 K7.4 PAD5.1 PAD6.1 PAD7.1 Q3.2 Q4.2 Q5.2 Q6.2 R6.2 R7.2 R8.2 R14.1 R17.2 R19.2 R20.2 R22.2 R25.2 R26.2 R28.2 R32.2 R34.2 R38.2 R44.2 R46.2 R51.2 R60.1 R65.1 R71.1 R84.2 R93.1 R110.2 R115.2 X1.2 X1.3 X1.4 X1.5 X4.2 X4.3 X4.4 X4.5
GND1: C130.- C131.- D10.A IC30.3 IC30.6
K01: IC1.72 JP2.13
K02: IC1.71 JP2.14
K03: IC1.70 JP2.15
K04: IC1.69 JP2.16
K05: IC1.68 JP2.17
K06: IC1.67 JP2.18
K07: IC1.66 JP2.19
K08: IC1.65 JP2.20
K09: IC1.62 JP2.21
K10: IC1.61 JP2.22
K11: IC1.60 JP2.23
K12: IC1.59 JP2.24
LED_OUT: IC1.81 JP2.6
MOD_EXT: D2.C R87.1 R88.1
N$1: C13.1 IC1.92 XC1.2
N$2: C14.1 IC1.91 XC1.1
N$3: C22.1 IC2.6
N$4: C19.1 IC2.3
N$5: C79.2 IC17.7 R92.2 R94.1
N$6: IC24.3 R107.1 R108.1
N$7: C20.1 IC2.2
N$8: C64.1 R67.1 R68.2
N$9: C59.1 IC12.7 R58.2
N$10: C21.1 IC2.1 R6.1
N$11: C123.+ IC28.1 R129.1 R130.2
N$12: IC2.20 R8.1 R13.2
N$13: IC2.19 R7.1 R12.2
N$14: C37.2 C38.1 C39.1 L5.2 L6.1
N$15: C39.2 C40.1 C41.1 L6.2 L7.1
N$16: C41.2 C42.1 K2.7 L7.2
N$17: C47.1 IC6.2 R18.2 R19.1
N$18: IC7.5 R23.2
N$19: IC3.19 R10.2 R79.1
N$20: IC7.1 K3.6 R20.1
N$21: IC10.5 R70.1 R71.2
N$22: C77.1 R89.1 R90.1
N$23: C29.1 IC3.6
N$24: C26.1 IC3.3
N$25: C27.1 IC3.2
N$26: IC13.2 R62.1 R63.2
N$27: IC6.3 K2.6 R17.1
N$28: IC19.5 IC21.6
N$29: C44.1 K2.5 L8.2
N$30: IC5.6 R15.1 R16.2
N$31: K5.3 K6.6
N$32: C58.1 R50.1
N$33: IC24.1 IC24.6 R108.2
N$34: IC5.3 R12.1 R14.2
N$35: IC5.2 R13.1 R15.2
N$36: R55.1 R56.1 R57.2
N$37: IC13.1 R63.1 R64.2
N$38: Q6.1 R78.1
N$39: IC13.6 IC13.7 R66.2
N$40: C65.1 IC14.2 R68.1 R69.2
N$41: IC27.18 K1.8
N$42: K4.2 R29.2 R30.2 R31.1
N$43: IC10.1 R73.1 R75.2
N$44: IC10.2 R72.1 R73.2
N$45: K1.3 R67.2
N$46: C70.1 IC11.3 R74.1
N$47: C71.1 IC11.1 R75.1
N$48: C60.1 R47.2 R57.1 R58.1
N$50: Q8.E R97.1
N$51: D12.C Q8.B R98.2
N$52: C51.1 IC8.3 R23.1
N$53: IC8.2 R24.2 R25.1 R26.1
N$54: IC8.6 K4.6 R24.1
N$55: IC17.6 R92.1 R93.2
N$56: IC25.1 IC25.5 R116.1
N$57: C129.1 C130.+ C136.+ IC30.1 IC31.7 L12.2
N$58: IC2.10 IC16.4
N$59: C61.1 L9.2 R61.1
N$60: IC11.10 R76.2
N$61: IC10.6 IC10.7 R72.2 R74.2
N$62: C59.2 IC12.6 R54.1 R55.2 R56.2
N$63: C36.1 C37.1 K2.2 L5.1
N$65: K2.3 R16.1
N$66: C62.1 C65.2 IC14.3 L9.1
N$67: C48.1 IC7.8 R21.1 R22.1
N$68: IC17.2 R85.2 R86.1 R88.2
N$69: C137.1 IC31.1
N$70: C43.1 K2.4 L8.1
N$71: IC12.1 R53.1 R54.2 R56.3
N$72: IC3.20 R11.2 R80.1
N$73: IC17.13 R81.2 R83.1
N$74: IC17.12 R82.2 R84.1
N$75: C75.1 R79.2 R81.1
N$76: C76.1 R80.2 R82.1
N$77: D1.3 IC15.8 IC15.9 R123.2 R125.2
N$78: IC15.2 IC15.5 IC15.13
N$79: IC18.3 IC18.4 IC18.9 IC18.12
N$80: IC18.6 R126.1
N$81: IC18.8 R127.1
N$82: IC18.11 R128.1
N$83: R87.2 X4.1
N$84: D8.A Q7.1 R99.2
N$85: C97.2 Q3.3
N$86: C98.2 Q4.3
N$87: R123.1 X3.1
N$88: R124.1 X3.2 X3.3 X3.4 X3.5
N$89: Q4.1 R120.1
N$90: R4.2 R5.1 XC2.3
N$92: K4.7 R27.1 R29.1 R30.1
N$93: K4.4 K4.5
N$94: K5.4 K5.5
N$95: IC17.14 R83.2 R85.1
N$96: K5.2 R35.2 R36.2 R37.1
N$97: K5.7 R33.1 R35.1 R36.1
N$98: K4.3 K5.6
N$99: D5.C R126.2 R127.2 R128.2 X2.1
N$100: Q3.1 R119.1
N$101: IC9.2 R45.2 R46.1 R47.1
N$102: IC24.2 R109.1 R110.1
N$103: IC25.3 R113.1 R114.1
N$104: K7.7 R51.1 X1.1
N$105: R27.2 R28.1
N$106: D3.3 IC9.6 R45.1 R48.1 R49.1
N$107: C79.1 R90.2 R91.1
N$108: C78.1 IC17.5 R91.2
N$109: D4.C K7.8 R48.2 R49.2 R50.2
N$111: R31.2 R32.1
N$112: D9.A IC27.12 K7.10
N$113: C80.1 IC17.10 R94.2
N$114: IC17.8 IC17.9 R95.1
N$115: C91.2 Q1.B R111.1
N$116: IC26.4 IC27.1
N$117: IC26.5 IC27.2
N$118: IC26.6 IC27.3
N$119: IC26.7 IC27.4
N$120: IC26.14 IC27.5
N$121: IC26.13 IC27.6
N$122: IC26.12 IC27.7
N$123: IC26.11 IC27.8
N$124: IC27.17 K2.8
N$125: C137.2 D11.C IC31.8 L15.1
N$126: IC27.16 K3.8
N$127: IC27.15 K4.8
N$128: IC27.14 K5.8
N$129: IC27.13 K6.8
N$130: IC9.3 K6.3 R44.1
N$131: IC13.5 R64.1 R65.2
N$132: C141.1 K6.2 L17.2
N$133: C140.1 K6.7 L17.1
N$134: K6.4 K6.5
N$135: D6.1 D7.1 Q1.C
N$136: D6.2 D7.2 Q2.3
N$138: IC12.2 R52.1 R53.2
N$139: C92.2 IC24.7 R111.2
N$140: IC25.2 R115.1 R116.2
N$141: C95.1 Q2.1 R117.1
N$142: C96.2 IC25.7 R117.2
N$143: C96.1 IC25.6 Q2.2 R118.2
N$144: C92.1 IC24.5 Q1.E R112.1
N$145: C85.2 Q9.3
N$146: C127.- IC29.1 R131.1 R132.2
N$147: C138.- D11.A IC31.6 L16.1
N$150: Q9.1 R100.2
N$152: C84.1 C85.1 D8.C IC19.1 Q7.3 Q8.C
N$153: C88.1 IC19.3 R101.2 R102.1
N$154: IC14.7 R69.1
N$155: IC21.4 IC22.3
N$156: IC2.17 R59.1 R60.2
N$158: IC20.4 R106.1
N$159: IC2.8 R4.1
N$160: IC3.8 R5.2
N$161: C28.1 IC3.1 R9.1
N$162: R102.2 R103.2 R104.1
N$163: C99.2 Q5.3
N$164: Q5.1 R121.1
N$165: C87.+ R105.1 R106.2
N$166: IC20.3 R104.2
N$167: IC20.6 IC22.1
N$174: B1.AC2 F1.2
N$175: B1.AC1 F2.2
N$176: B1.+ C121.+ C122.1 IC28.3 L12.1
N$179: B1.- C125.- C126.2 IC29.2
N$184: R33.2 R34.1
N$185: R37.2 R38.1
N$187: F1.1 SV1.1
N$190: D10.C IC30.2 L13.1
N$193: F2.1 SV1.4
PDI_CLK: IC1.90 JP1.5 R1.1
PDI_DAT: IC1.89 JP1.1
PGND: C121.- C122.2 C123.- C124.- C125.+ C126.1 C127.+ C128.+ C129.2 C136.- C138.+ IC30.5 IC31.4 L15.2 PAD4.1 R130.1 R131.2 SV1.2 SV1.3
PULSE: IC22.4 IC23.1
PWM: IC17.1 K1.4 R86.2 R89.2
RES_EN: IC1.18 IC15.3
RS: IC1.75 JP2.12
SBO: IC2.16 R3.1
SBO1: C23.1 IC16.3 R2.2 R3.2
SBO2: IC3.16 IC16.1
SBO_SEL: IC1.37 IC16.6
SCLK1: IC1.32 IC2.14 IC3.14
SCLK2: IC1.42 IC4.12
SDAC: IC1.39 IC4.13
SDATA1: IC1.30 IC2.13 IC3.13
SDATA2: IC1.40 IC4.14
SDDS1: IC1.28 IC2.15
SDDS2: IC1.29 IC3.15
SET_AMPL: IC4.3 R21.2
SET_OFFS: IC4.7 IC12.3
SQ_PL_TTL: IC11.13 IC18.1 IC23.4 R122.2
SQ_PL_WF: D6.3 R76.1
SQUARE: IC14.8 IC20.1 IC21.1 IC23.3 R99.1
STR: IC1.25 IC26.1
SYNC_EN: IC1.21 IC18.2
T1: IC1.20 R122.1
TRIG_IN: IC1.19 IC15.10 IC15.11
TRIG_IN_EN: IC1.16 IC15.12
TRIG_OUT: IC1.22 IC18.5 IC18.10 IC18.13
V+: C54.+ C55.1 C103.1 C105.1 C107.1 C109.1 C111.1 C113.1 C124.+ D3.2 IC9.7 IC10.8 IC12.8 IC13.8 IC17.4 IC24.8 IC25.8 IC28.2 R129.2
V-: C56.- C57.2 C104.1 C106.1 C108.1 C110.1 C112.1 C114.1 C128.- D3.1 IC9.4 IC10.4 IC12.4 IC13.4 IC17.11 IC24.4 IC25.4 IC29.3 R132.1
VCC: C34.1 C45.1 C49.1 C52.1 C66.+ C67.1 C72.1 C89.+ C90.1 C91.1 C120.1 C135.+ IC5.7 IC6.7 IC7.6 IC8.7 IC11.14 IC14.1 IC23.5 L14.2 R109.2 R112.2
VCC_A1: C17.+ C18.1 C19.2 C32.1 IC2.4 IC4.5 L2.2 L4.2
VCC_A2: C25.1 C26.2 IC3.4 L3.2
VCC_D1: C31.1 IC4.11 IC4.15 IC4.16 L4.1
VDD: C1.+ C2.+ C5.1 C6.1 C7.1 C8.1 C9.1 C10.1 C11.1 C12.1 C15.+ C16.1 C24.1 C30.1 C115.1 C116.1 C117.1 C134.1 D1.2 IC1.14 IC1.24 IC1.34 IC1.44 IC1.54 IC1.64 IC1.74 IC1.83 IC2.5 IC3.5 IC15.14 IC16.5 IC26.15 IC26.16 IC32.2 JP1.2 JP2.5 L1.1 L2.1 L3.1 PAD2.1 R1.2 R2.1 R125.1 XC2.1 XC2.4
VEE: C35.2 C46.2 C50.2 C53.2 C68.2 C69.- C73.1 C93.- C94.2 C95.2 C139.- IC5.4 IC6.4 IC7.3 IC8.4 IC11.8 IC14.4 L16.2 R114.2 R118.1
VREF: C33.1 IC4.1 L11.2 R52.2 R62.2 R70.2
WDT_SEL1: IC1.51 R100.1
WDT_SEL2: IC1.45 IC19.6 IC22.6

## Tracks (layer width: path | path; a pad name or v marks a point on that pad's centre or on a via)
0V  (via drill 0.6)
  Top 0.254: 71.28,34.29 71.44,34.13 71.44,29.37 70.96,28.89 | 15.72,58.42 14.29,59.85 14.29,62.87 v18.1,66.67
  Top 0.305: IC3.10 82.18,19.36 v82.55,18.94 | IC3.7 82.86,21.31 v82.55,21.32 | IC3.12 85.76,20.01 v85.72,20.37 | IC2.12 86.08,41.28 v85.41,41.32 | IC2.7 82.24,42.59 v82.55,42.59 | IC3.18 86.09,23.91 v85.72,23.54 86,23.26 IC3.17 | IC1.93 36.08,42 v36.51,42.43 | IC1.84 36.1,46.5 v36.51,46.09 | IC1.73 37.86,51.24 v38.26,50.85 | IC1.63 42.86,51.32 v43.34,50.85 | IC1.53 47.86,51.24 v48.26,50.85 | IC1.43 49.65,47 v49.21,46.56 | IC1.33 49.57,42 v49.21,41.64 | IC1.23 47.86,37.75 v47.47,38.15 | IC1.13 42.86,37.67 v42.39,38.15 | IC1.3 37.86,38.7 v37.78,38.78 | IC21.3 79.85,63.86 80.17,63.55 v80.17,62.91 | 73.66,15.88 73.34,15.88 71.44,17.78
  Top 0.406: C132.- 8.26,67.94
  Top 0.61: v42.55,3.7 42.39,3.54 IC26.8 | v54.61,3.7 | v54.61,3.7 54.45,3.54 IC27.9 | C23.2 87.63,34.34 v87.63,34.18 | D1.1 25.71,22.27 v26.04,22.27 | v20,21.64 20,23.38 R124.2 | v16.83,43.55 18.41,43.54 C14.2 | C13.2 17.46,34.02 v16.83,34.02 | v82.23,34.66 IC16.2 | v57.63,53.7 IC20.2 | v62.55,60.05 IC19.2 | v80.17,62.91 IC21.2 | v80.17,57.99 IC22.2 | v28.57,9.84 IC18.7
  Top 1.016: C22.2 74.7,40.37 74.06,41.01 74.06,41.55 v73.98,41.64 73.98,42.27 74.61,42.91 C16.2 | v74.3,35.29 C116.2 | v74.3,24.18 C25.2 | v74.3,21.64 C24.2 | v74.3,19.1 C29.2 | v80.17,31.48 80.17,30.21 C27.2 | v83.03,31.48 83.03,30.21 C28.2 | v24.45,57.52 C134.2 | v24.45,53.07 C133.2 | v28.57,40.37 C100.2 | v28.57,35.29 C81.2 | v66.04,51.8 R103.1 | C119.2 v73.5,66.56 | v59.69,45.13 C87.- | C88.2 58.15,56.88 v58.1,56.83 | v66.04,62.39 R98.1 | C84.2 63.48,63.45 v63.48,62.39 | v69.85,55.56 C83.2 | v71.6,57.94 72.73,57.94 C82.- | C30.2 v60.64,23.34 | v68.74,24.45 68.74,22.91 | v67.63,24.45 67.63,23.18
  Bottom 0.254: v73.5,66.56 76.68,66.56 v80.17,62.91
  Bottom 0.305: v83.03,31.48 84.14,31.48 84.45,31.16 84.45,30.37 84.45,23.54 | 84.45,23.54 82.87,21.95 82.87,21.32 v82.55,21.32 82.55,20.37 | 82.55,20.37 v82.55,18.94 | 82.55,20.37 v85.72,20.37 | 85.72,34.66 v85.41,41.32 83.5,41.32 v82.55,42.59 | 84.45,23.54 v85.72,23.54 | v36.51,42.43 36.67,42.43 | 38.26,50.69 v38.26,50.85 | v43.34,50.85 43.34,50.69 | v48.26,50.85 48.26,50.69 | 49.05,41.64 v49.21,41.64 | C12.2 | C2.- 34.29,56.56 36.83,56.56 C6.2 C7.2 | C8.2 C7.2 | C8.2 | 50.01,54.5 50.16,54.5 50.32,54.34 | 50.01,54.5 C8.2 | C9.2 52.86,50.33 52.39,50.8 52.38,52.28 50.32,54.34 | 50.32,54.34 50.01,54.5 | 32.86,43.55 C3.2 | 32.86,43.55 C5.2 | C5.2 | C4.2 36.67,34.5 32.86,38.3 C3.2 | C9.2 52.86,45.13 C10.2 | C10.2 | C9.2 52.86,45.29 52.7,45.13 47.94,45.13 | C7.2 | 45.88,34.5 C12.2 | C3.2 29.37,41.16 v28.57,40.37 | 24.45,50.53 24.45,43.55 32.86,43.55 | C5.2 32.86,44.34 33.02,44.18 36.51,44.18 | v57.63,53.7 57.47,53.98 56.83,54.61 56.83,56.2 56.83,58.15 62.55,58.15 | v66.04,51.8 66.04,48.31 69.85,43.18 71.39,41.64 v73.98,41.64 | 45.88,34.5 C11.2 | 45.88,34.5 46.04,34.66 46.04,39.42
  Bottom 0.406: C118.2 39.05,8.94 40.96,8.94 | R11.1 R10.1 84.46,30.21 84.45,30.37 | 52.7,51.12 52.7,47.99 55.4,47.83 C9.2 | 66.04,58.15 62.55,58.15 | v57.63,53.7 C86.2 | v66.04,51.8 66.04,55.29 | 62.55,58.15 v62.55,60.05 63.48,60.05 v63.48,62.39 | 62.55,58.15 | 87.15,42.7 88.74,42.7 88.9,42.86 | 56.83,58.15 56.83,59.53 55.56,60.8 55.56,66.04 55.72,66.2 Q7.2 57.42,66.2 v57.47,66.09 57.31,70.01 Q9.2
  Bottom 0.61: v74.3,19.1 v74.3,21.64 v74.3,24.18 74.3,28.3 76.83,28.3 76.83,31.48 | 76.83,31.48 v80.17,31.48 80.17,30.21 83.03,30.21 v83.03,31.48 83.5,31.48 83.5,34.66 | 76.83,31.48 76.83,35.29 v74.3,35.29 74.06,35.52 C15.- 74.06,41.09 v73.98,41.64 | 83.5,34.66 v82.23,34.66 | v42.55,3.7 40.96,3.7 40.96,8.94 40.96,10.21 41.75,10.21 C117.2 28.57,12.43 | 54.61,3.54 C102.2 | 56.52,4.17 C102.2 | v42.55,3.7 | v42.55,3.7 42.7,3.54 54.61,3.54 | 54.61,3.54 v54.61,3.7 | 83.5,34.66 85.72,34.66 87.63,34.66 v87.63,34.18 | 36.51,44.18 v36.51,42.43 | 36.51,44.18 v36.51,46.09 | 38.26,50.69 38.26,49.74 38.42,49.58 43.5,49.58 | v43.34,50.85 43.34,49.74 43.5,49.58 | 47.94,49.58 43.5,49.58 | v48.26,50.85 48.26,49.58 47.94,49.58 | 47.94,46.4 47.94,49.58 | v49.21,46.56 48.1,46.56 47.94,46.4 | 47.94,41.64 49.05,41.64 | 47.94,41.64 47.94,45.13 47.94,46.4 | 47.94,41.64 47.94,39.42 47.31,39.42 | v47.47,38.15 47.47,39.26 47.31,39.42 | 42.23,39.42 46.04,39.42 47.31,39.42 | v42.39,38.15 42.39,39.26 42.23,39.42 | v37.78,38.78 37.78,39.42 41.59,39.42 | 41.59,39.42 42.23,39.42 | 41.59,39.42 41.59,44.18 36.51,44.18 | X2.4 X2.3 | X2.4 X2.5 X2.2 25.4,12.43 | X2.4 18.72,20.68 18.73,20.68 18.73,21.64 | v16.83,43.55 v16.83,34.02 16.83,23.54 18.73,21.64 | 18.73,21.64 v20,21.64 20.32,22.27 v26.04,22.27 26.04,20.32 28.52,20.32 | JP1.6 9.53,43.55 v16.83,43.55 | v16.83,43.55 18.42,43.55 v16.83,43.55 | JP2.3 JP2.1 22.86,62.28 24.45,60.69 v24.45,57.52 | C11.2 51.04,34.5 C1.- | v80.17,62.91 v80.17,57.99 | 25.4,12.43 28.57,12.43 | 28.57,12.43 v28.57,9.84 | 25.4,12.43 25.4,3.17 21.27,3.17 D5.A
  Bottom 0.813: 55.88,5.76 C101.- 56.52,5.85 56.52,4.17 C102.2 | 66.04,55.29 66.04,58.15 | v62.55,60.05
  Bottom 1.016: v24.45,57.52 v24.45,53.07 24.45,50.53 23.81,49.9 19.68,49.9 18.41,48.62 18.41,43.55 18.42,43.55 | v28.57,40.37 v28.57,35.29 | 73.45,66.56 73.5,66.52 v73.5,66.56 | 52.86,45.13 v59.69,45.13 | v58.1,56.83 57.47,56.83 56.83,56.2 | v63.48,62.39 v66.04,62.39 | v71.6,57.94 69.85,56.2 v69.85,55.56 69.58,55.29 66.04,55.29 | v60.64,23.34 60.64,23.18 67.63,23.18 | v74.3,24.18 71.8,24.18 70.8,23.18 67.63,23.18 | v68.74,24.45 v67.63,24.45 67.63,23.18
  Bottom 2.54: 81.44,42.7 87.15,42.7
  other vias: 9.84,57.15 9.84,55.24 9.84,53.34 11.11,54.29 11.11,56.2 12.38,57.15 12.38,55.24 12.38,53.34 83.82,43.18 85.41,43.18 8.26,66.67 83.91,41.37 70.48,35.29 70.8,26.72 70.8,19.73 79.38,15.29 42.55,20.32 21.91,41.64 21.91,35.92 37.15,27.99 26.04,25.77 26.35,31.8 27.94,57.52 27.94,53.07 3.81,66.67 3.81,56.52 3.81,46.35 3.81,36.2 3.81,26.04 3.81,15.88 3.81,5.71 10.79,3.81 18.41,3.81 12.38,46.35 74.93,9.57 87.31,9.57 96.52,18.78 68.58,31.43 63.66,31.43 68.26,41.59 60.96,38.89 64.91,60.01 57.47,67.99 56.99,60.37 53.98,60.37 55.88,53.7 56.2,26.56
  pour Bottom (isolate 0.406): 1.59,1.59 67.94,1.59 73.98,8.89 87.63,8.89 97.16,18.41 97.16,28.57 91.76,28.57 91.76,41.91 89.85,43.81 79.85,43.81 79.53,43.5 73.34,43.5 70.01,43.66 70.01,50.01 73.5,53.5 80.64,53.5 80.64,66.67 79.69,67.63 79.69,71.75 79.06,72.39 52.07,72.39 52.07,60.64 52.7,60.01 54.77,57.94 54.77,51.28 55.09,50.96 57.94,50.96 57.94,50.32 54.77,50.32 54.13,50.96 54.13,57.63 51.44,60.33 51.44,72.39 1.59,72.39
  pour Top (isolate 0.406): 1.59,1.59 67.94,1.59 73.98,8.89 87.63,8.89 97.16,18.41 97.16,28.57 91.76,28.57 91.76,41.91 89.85,43.81 79.85,43.81 79.53,43.5 73.34,43.5 70.01,43.66 70.01,50.01 73.5,53.5 80.64,53.5 80.64,66.67 79.69,67.63 79.69,72.39 52.07,72.39 52.07,60.64 54.77,57.94 54.77,57.78 54.77,51.28 55.09,50.96 57.94,50.96 57.94,50.32 54.77,50.32 54.13,50.96 54.13,57.63 52.39,59.37 51.44,60.33 51.44,72.39 1.59,72.39
!SQ!/PL  (via drill 0.6)
  Top 0.305: 123.83,59.42 IC23.6 | v104.46,56.24 104.78,56.56 104.78,69.74 103.19,71.33 102.23,71.33 v101.6,71.96 | IC1.52 48.36,57.62 53.02,62.28 53.34,62.59 53.34,67.83 55.4,69.9 74.45,69.9 75.62,68.73 81.06,68.73 83.98,71.64 | v91.92,71.96 91.44,71.96 91.28,71.96 90.33,71.96 90.01,71.64 83.98,71.64 | 83.98,71.64
  Top 0.406: R78.2 123.19,60.85 123.83,60.21 IC23.6 | 123.83,59.42 123.19,59.42 120.02,56.24 v119.38,56.24
  Bottom 0.305: v104.46,56.24 104.78,55.93 117.79,55.93 118.11,56.24 v119.38,56.24 | v91.92,71.96 v101.6,71.96
+5V/1  (via drill 0.6)
  Top 0.305: 73.03,71.48 72.71,71.17
  Top 0.406: 130.18,21.64 129.53,21.01 | K3.1 129.87,10.84 129.54,10.84 | K1.1 110,58.48 113.51,54.98 114.62,54.98 115.89,53.7 115.89,39.73 119.38,36.24 120.33,36.24 v120.65,36.56 | v120.65,33.07 K2.1 | 181.78,58.16 v183.82,58.16 v183.83,58.15 | v179.07,108.31 K7.1 | 8.26,71.8 C132.+
  Top 0.61: 36.2,2.11 IC18.14 36.93,5.55 v37.47,5.76 | K2.1 120.64,29.27 122.56,27.35 122.56,24.18 v122.24,23.86 | v128.91,23.86 129.22,23.86 130.18,22.91 130.18,21.64 129.54,21 129.54,10.84 v129.54,5.13 | IC30.4 95.14,98.99 93.34,97.2 89.22,97.2 87.31,95.3 C131.+ | 77.63,71.48 77.79,71.33 L10.1 | PAD1.1 15.56,60.64 15.88,60.33 18.68,60.33 v18.73,60.37
  Top 0.813: IC32.1 18.99,53.01 v18.73,53.07 | 27.15,71.48 26.99,71.48 | K6.1 181.78,58.16 181.29,57.67 181.29,45.45 | 181.29,45.45 181.29,33.23 181.77,32.75 K4.1 | K4.1 | K5.1 181.3,45.46 181.29,45.45 | v183.83,32.75 K4.1
  Top 1.016: 25.4,71.48 25.24,71.8 8.26,71.8 4.45,71.8 2.22,69.58 2.22,4.17 4.29,2.11 36.2,2.11 58.9,2.11 v60.33,3.54 IC27.10 v64.14,3.54 | L14.1 89.49,89.27 87,91.76 87,95.15 C131.+
  Top 1.27: JP2.2 21.59,68.94 20.32,67.67 20.32,61.96 v18.73,60.37 | v18.73,53.07 C133.1 | L13.2 86.88,95.32 C131.+
  Top 1.676: JP2.2 JP2.4 25.4,71.48 27.15,71.48 73.03,71.48 77.63,71.48 79.69,71.48 80.64,72.44 80.69,72.44 82.23,73.98 90.17,73.98 95.89,79.69 95.89,86.36 96.06,86.53 L14.1
  Bottom 0.406: v120.65,33.07 v120.65,36.56 | v183.83,58.15 184.47,58.15 185.1,58.78 185.1,99.9 183.83,101.17 177.64,101.17 177.01,101.81 177.01,106.41 177.64,107.05 178.86,107.05 D9.C v179.07,108.31
  Bottom 0.61: 58.42,4.17 C102.1 | v60.33,3.54 C102.1 | v37.47,5.76 C118.1 | v128.91,23.86 v122.24,23.86
  Bottom 0.813: 59.05,5.76 C101.+ 58.42,5.85 58.42,4.17 C102.1 | v183.83,32.75 184.78,31.8 184.78,4.81 183.2,3.22 142.24,3.22 139.7,5.76 138.43,5.76 136.84,4.17 129.54,4.17
  Bottom 1.016: v64.14,3.54 66.99,6.4 69.85,6.4 72.07,4.17 129.54,4.17 v129.54,5.13
  Bottom 1.27: v18.73,60.37 v18.73,53.07
+5V/2  (via drill 0.6)
  Top 0.254: 69.53,58.47 69.74,58.47 69.85,58.58 69.85,61.12 72.91,61.12 C82.+ 73.5,61.71 | 70.48,58.42 71.75,59.69 74.3,59.69 74.3,58.42 75.25,58.42 75.25,60.17 74.14,61.28 74.14,61.91 75.09,62.87 75.09,63.02 74.93,63.18 68.74,63.18 68.74,62.39 69.22,61.91 69.22,58.42 70.48,58.42
  Top 0.406: C83.1 69.53,58.47
  Top 0.61: C83.1 | IC19.4 67.31,59.1 67.63,58.78 67.63,58.47 | 67.63,58.47 69.53,58.47 | 75.09,62.91 IC21.5 | C119.1 74.77,63.39 75.09,62.91 | 75.09,62.91 75.09,65.14 76.2,66.41 L10.2 | 67.63,58.47 67.63,56.4 66.99,55.77 v62.55,55.77 | v62.39,53.7 IC20.5 | IC22.5 75.52,57.99 74.93,58.58 74.93,59.33 C82.+ | 73.18,61.59 73.18,63.34
  Top 1.016: D12.A 68.9,63.39 R97.2 C119.1
  Bottom 0.61: C86.1 v62.39,53.7 62.55,53.86 v62.55,55.77
  pour Top (isolate 0.406): 74.3,58.42 74.3,59.69 71.75,59.69 70.48,58.42 69.22,58.42 69.22,61.91 68.74,62.39 68.74,63.5 75.09,63.5 75.09,62.71 74.93,62.71 74.14,61.91 74.14,61.28 75.25,60.17 75.25,58.42
A_WF  (via drill 0.6)  (1 unrouted)
  Top 0.406: 135.57,17.8 135.57,14.34 134.3,13.06 v131.13,13.06 | R18.1 119.22,17.35 119.22,13.54 119.7,13.06 IC6.6 v123.51,13.06 123.83,13.07 | R18.1 | R18.1 120.97,17.51 123.51,20.05 123.51,28.3 127,31.8 R59.2 R61.2
  Bottom 0.406: v123.51,13.06 v131.13,13.06
ADC0
  Top 0.305: C81.1 | C81.1 R96.1 32.7,37.83 33.23,38.36 33.23,39 | 33.23,39 IC1.99 | IC1.96 33.78,40.5 33.23,39.95 33.23,39 | C81.1 31.75,34.34 31.43,34.02 31.11,34.02 30.8,33.7 30.8,31.16 30.48,30.84 30.16,30.84 29.84,30.53 R95.2
AREF
  Top 0.305: IC1.95 33.33,41 32.7,40.37 C100.1 31.75,39.42 31.43,39.1 30.16,39.1 29.85,38.78 R96.2 27.94,37.83 27.3,37.2 27.3,33.07 27.94,32.43 L11.1
AVCC  (via drill 0.6)
  Top 0.305: IC1.4 38.36,37.77 v39.05,38.47 | IC1.94 36.5,41.5 v36.83,41.16
  Top 0.61: v36.83,41.16 37.94,41.16 39.05,40.05 v39.05,38.47
  Bottom 0.305: v39.05,38.47 38.73,38.15
  Bottom 0.61: 38.73,36.4 C4.1 v39.05,38.47 | C3.1 v36.83,41.16 38.58,41.16 39.05,41.64 39.05,42.62 L1.2 | C3.1
BURST  (via drill 0.6)
  Top 0.305: IC2.11 89.27,40.63 89.53,40.37 89.53,19.41 89.06,18.94 88.11,18.94 87.68,19.36 IC3.11 85.99,19.36 85.41,18.78 85.41,15.92 | 85.41,15.92 85.57,15.92 v85.72,15.92 85.41,15.92 | 85.41,15.92 85.41,14.97 83.82,13.38 73.98,13.38 67.31,20.05 56.83,20.05 v56.52,20.37 | v42.55,21.95 36.3,21.95 36.3,21.49 IC15.1
  Top 0.406: R77.2 99.54,39.73 98.42,38.62 98.42,36.88 97.47,35.92 97.47,23.7 95.89,22.11 94.3,22.11 92.87,20.68 92.87,17.03 v91.44,15.61
  Bottom 0.305: v42.55,21.95 43.81,21.95 46.35,19.41 49.53,19.41 50.8,20.68 56.2,20.68 v56.52,20.37 | v85.72,15.92 86.04,15.61 v91.44,15.61
BURST_SQU  (via drill 0.6)
  Top 0.305: IC11.12 146.69,54.5 146.37,54.82 140.97,54.82 140.02,55.77 140.02,60.37 139.54,60.85 129.86,60.85 v129.22,60.21
  Top 0.406: v129.22,60.21 129.22,54.34 132.72,50.85 132.72,44.81 131.6,43.7 130.33,43.7 128.59,41.96 122.56,41.96 121.6,41.01 v117.47,41.01 | R77.1 110.49,39.73 v111.76,38.47
  Bottom 0.305: 128.1,61.81 127.95,61.96 127.95,63.55 | 127.95,63.55 C74.1 | 127.95,63.55 127.95,66.26 Q6.3 128.1,61.81 | 128.1,61.81 129.22,60.69 v129.22,60.21
  Bottom 0.406: v111.76,38.47 114.3,41.01 v117.47,41.01
CAP1  (via drill 0.6)
  Top 0.305: R119.2 130.81,32.75 129.22,31.16 125.57,27.51 125.57,10.05 123.35,7.83 73.82,7.83 65.41,16.24 54.29,16.24 51.75,18.78 51.75,22.59 50.8,23.54 v50.48,23.54 | IC1.12 42.36,34.84 42.55,34.66 42.55,27.99 42.23,27.67 v42.23,26.72
  Bottom 0.305: v50.48,23.54 46.04,23.54 42.86,26.72 v42.23,26.72
CAP2  (via drill 0.6)
  Top 0.305: R120.2 129.22,30.21 126.21,27.19 126.21,9.73 123.67,7.19 73.5,7.19 65.09,15.61 53.98,15.61 51.12,18.46 51.12,21.32 50.16,22.27 v49.53,22.27 | IC1.11 41.86,34.7 41.91,34.66 41.91,28.3 40.96,27.35 v40.96,26.72
  Bottom 0.305: v49.53,22.27 46.35,22.27 42.86,25.77 41.91,25.77 v40.96,26.72
CAP3  (via drill 0.6)
  Top 0.305: R121.2 127.64,27.67 126.84,26.88 126.84,9.41 123.98,6.56 73.18,6.56 64.77,14.97 53.66,14.97 50.48,18.14 50.48,20.37 49.85,21 v48.58,21 | IC1.10 41.36,34.74 41.27,34.66 41.27,28.62 39.69,27.04 v39.69,26.72
  Bottom 0.305: v48.58,21 46.67,21 42.55,25.13 40.96,25.13 39.69,26.4 v39.69,26.72
CLK
  Top 0.305: IC26.3 41.91,9.89 43.81,11.79 43.81,13.7 47.62,17.51 47.62,22.27 52.39,27.04 52.39,38.78 52.17,39 IC1.27
D_WF
  Top 0.406: C99.1 147.13,23.67 145.41,21.95 141.92,21.95 140.02,20.05 K3.5
  Top 0.61: C99.1 147.13,27.22 146.68,27.67 C98.1 C97.1 146.69,34.66 145.41,35.92 D7.3
DAC0  (via drill 0.6)
  Top 0.305: v40.32,28.94 | v40.32,28.94 38.89,30.37 | 38.89,30.37 | 38.89,30.37 38.73,30.53 38.73,32.59 36.2,35.13 36.2,37.51 36.83,38.15 36.83,39.58 36.41,40 IC1.97
  Top 0.406: IC13.3 114.62,69.58 113.98,70.22 110.17,70.22 v107.47,67.52 | v102.08,67.52 100.65,67.83 99.06,66.25 99.06,56.56 97,54.5 | 97,54.5 | 97,54.5 96.84,54.34 86.04,54.34 82.07,50.37 74.77,50.37 73.18,48.78 | 73.18,48.78 | 73.18,48.78 73.18,48.62 73.18,44.02 71.91,42.75 71.91,38.78 67.31,34.18 61.59,34.18 60.48,33.07 v59.37,33.07
  Bottom 0.305: v40.32,28.94 40.64,29.26 53.98,29.26 57.78,33.07 v59.37,33.07
  Bottom 0.406: v102.08,67.52 v107.47,67.52
DAC1  (via drill 0.6)
  Top 0.305: IC1.98 36.12,39.5 36.2,39.42 36.2,38.31 35.56,37.67 35.56,34.81 38.1,32.27 38.1,30.21 39.05,29.26 v39.05,27.99
  Top 0.406: R9.2 85.41,31.48 84.14,32.75 79.69,32.75 79.06,32.12 75.88,32.12 75.25,31.48 v74.93,31.48 | v69.85,31.48 70.17,31.8 70.17,33.38 69.53,34.02 68.26,34.02 67.63,33.38 61.91,33.38 60.64,32.12 v58.26,32.12
  Bottom 0.305: v58.26,32.12 57.78,32.12 54.29,28.62 41.59,28.62 40.96,27.99 v39.05,27.99
  Bottom 0.406: v69.85,31.48 v74.93,31.48
DAC2  (via drill 0.6)
  Top 0.305: IC1.7 39.86,33.88 39.37,33.38 39.37,32.12 40.32,31.16 v40.32,30.84
  Top 0.406: 96.2,55.93 95.73,55.93 | 96.2,55.93 85.41,55.93 81.44,51.96 74.14,51.96 71.6,49.42 71.6,44.66 70.33,43.39 70.33,39.42 66.67,35.77 60.96,35.77 60.17,34.97 v59.37,34.97 | 96.2,55.93 97.47,57.2 97.47,70.85 108.27,81.8 108.9,81.8 110.01,82.76 110.01,83.39 113.51,86.88 127.48,86.88 130.02,89.42 146.37,89.42 148.75,87.04 148.75,79.11 147.8,78.15 142.24,78.15 140.18,76.09 140.18,75.77 v140.02,75.61 139.86,75.77 138.75,74.66 138.75,70.22 134.62,66.09 v134.62,65.77 | v154.46,65.93 155.57,67.04 155.57,75.45 154.46,76.56 144.78,76.56 v143.83,75.61
  Bottom 0.305: v59.37,34.97 57.78,34.97 53.34,30.53 40.64,30.53 v40.32,30.84
  Bottom 0.406: v134.62,65.77 R113.2 | v134.62,65.77 | R107.2 153.67,65.14 v154.46,65.93 | v140.02,75.61 v143.83,75.61
DAC3  (via drill 0.6)
  Top 0.305: IC1.8 40.36,33.03 v40.32,32.75
  Top 0.406: v59.37,36.88 59.37,37.04 59.42,36.88 59.21,37.15 59.21,39.26 60.64,40.69 v60.96,40.69
  Bottom 0.305: v40.32,32.75 40.96,32.75 41.91,31.8 52.7,31.8 56.83,35.92 56.99,36.08 57.78,36.88 v59.37,36.88
  Bottom 0.406: R101.1 60.96,42.59 v60.96,40.69
DAC4
  Top 0.305: R105.2 64.14,46.88 63.66,46.4 56.2,46.4 54.1,48.5 IC1.46
DATA
  Top 0.305: IC26.2 41.91,11.16 43.18,12.43 43.18,14.02 46.99,17.83 46.99,22.59 51.75,27.35 51.75,36.88 50.86,37.77 IC1.26
DB4
  Top 0.305: JP2.10 34.29,67.67 34.29,65.14 33.02,63.87 33.02,50.53 33.55,50 IC1.77
DB5
  Top 0.305: JP2.9 33.02,65.14 32.38,64.5 32.38,50.21 33.1,49.5 IC1.78
DB6
  Top 0.305: JP2.8 31.75,67.67 31.75,49.9 32.65,49 IC1.79
DB7
  Top 0.305: JP2.7 30.48,65.14 31.11,64.5 31.11,49.58 32.2,48.5 IC1.80
DUTY  (via drill 0.6)
  Top 0.406: K1.2 109.98,61.68 111.92,59.74 111.92,57.83 112.87,56.88 R66.1
  Top 0.61: v108.27,60.53 108.27,61.67 K1.2
  Bottom 0.61: C63.1 v108.27,60.53
EN
  Top 0.305: JP2.11 35.56,65.14 33.66,63.23 33.66,50.85 34.01,50.5 IC1.76
FSEL  (via drill 0.6)
  Top 0.305: IC2.9 80.29,41.28 80.01,41.01 80.01,39.73 80.33,39.42 v80.96,39.42 | v81.6,26.4 v81.6,31.48 | v82.87,24.5 82.55,24.18 82.55,22.91 83.5,21.95 83.5,20.05 83.54,20.01 | 82.83,20.01 IC3.9 83.54,20.01 | 83.54,20.01 84.77,18.78 84.77,15.29 83.5,14.02 74.3,14.02 67.63,20.68 57.94,20.68 56.99,21.64 v56.04,21.64 | v37.62,23.38 38.1,23.86 42.07,23.86 v42.55,23.38 | IC15.4 v32.38,23.54
  Bottom 0.305: v81.6,31.48 81.6,32.12 80.96,32.75 v80.96,39.42 | v81.6,26.4 81.6,25.45 v82.87,24.5 | v32.38,23.54 32.38,23.38 v37.62,23.38 | v42.55,23.38 43.34,23.38 46.67,20.05 49.21,20.05 50.48,21.32 55.72,21.32 v56.04,21.64
FSEL_EN
  Top 0.305: IC1.17 44.86,34.59 44.77,34.5 44.77,27.04 42.86,25.13 34.29,25.13 33.81,24.65 30.96,24.65 29.84,23.54 IC15.6
GND  (via drill 0.6)  (1 unrouted)
  Top 0.305: IC2.18 85.78,45.19 v85.41,45.13 | IC4.9 88.53,67.09 v88.9,66.72 88.62,66.44 IC4.10 | 136.68,16.19 136.68,19.53 | 87.15,45.2 91.45,45.2 91.5,45.15 | 106.36,40.96 104.14,40.96